# Allegro board SWM3310_V10.brd
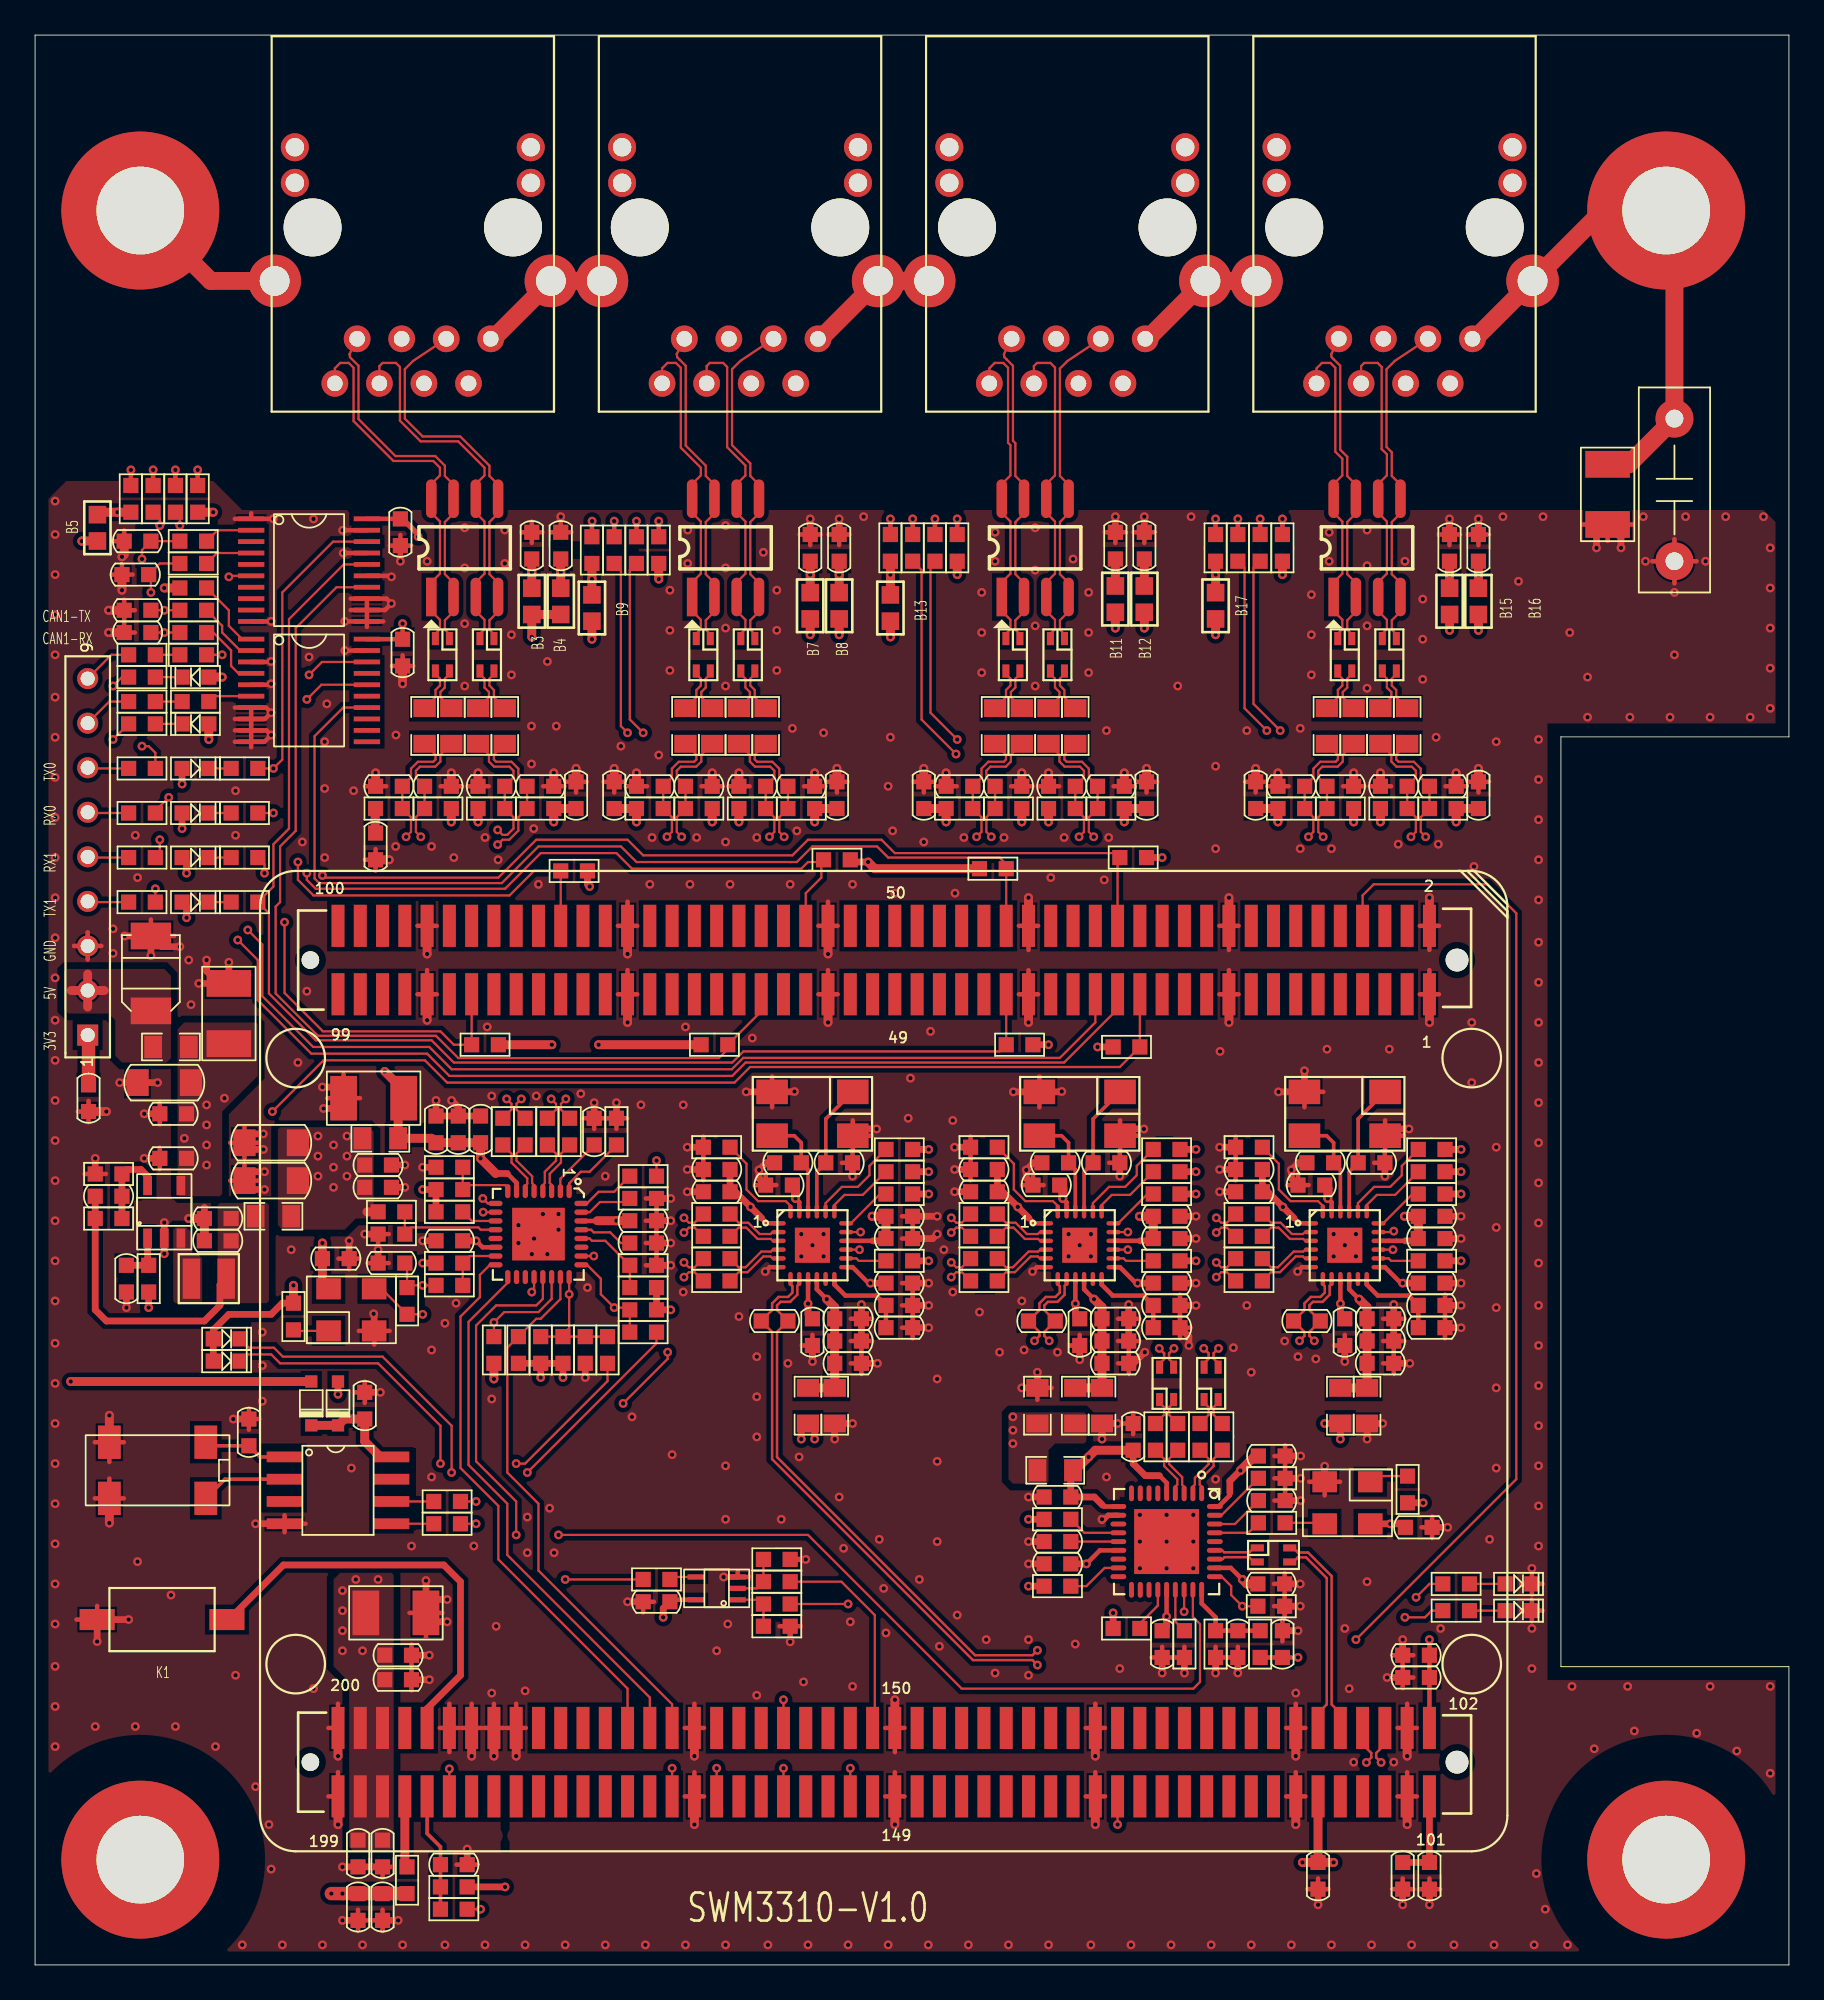
[diagram p0: board, top side]
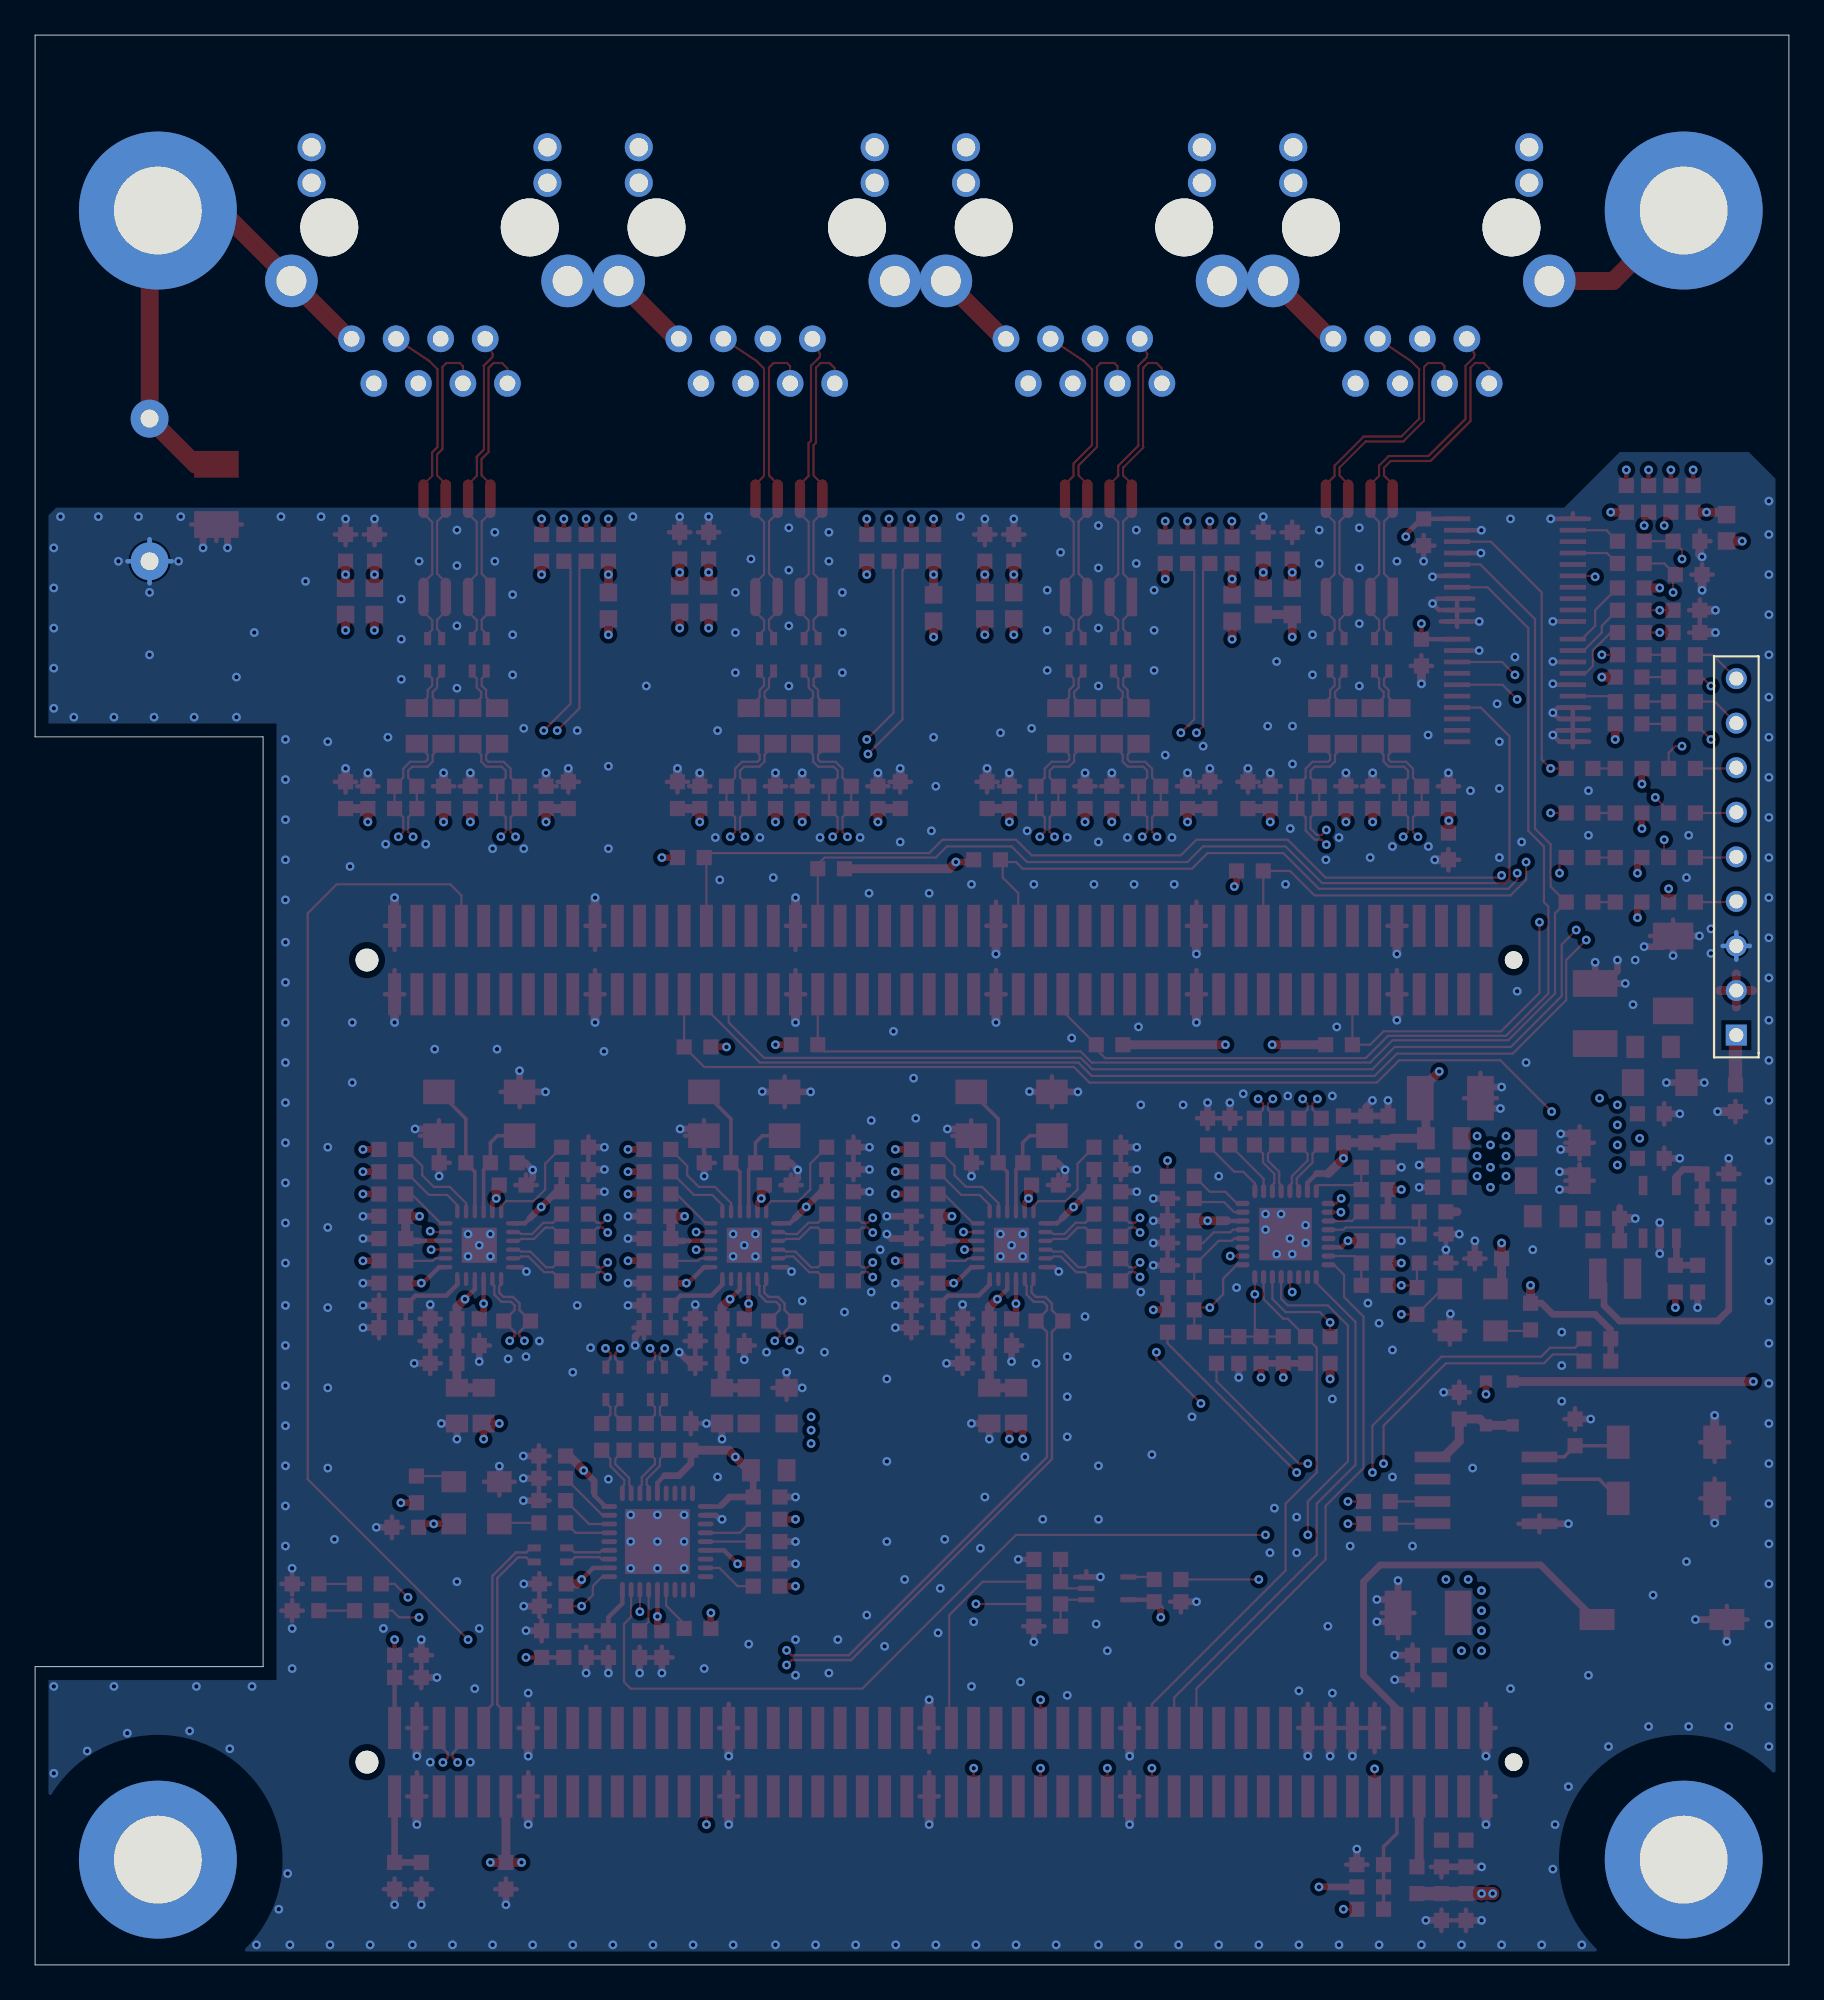
[diagram p1: board, bottom side, seen from below]

Outline 100 x 110 mm; copper layers: TOP, GND2, POWER3, BOTTOM. Coordinates in mm from the lower left corner of the outline.
Outline path: 0,110 0,0 100,0 100,17 87,17 87,70 100,70 100,110 0,110

## Design rules (mm)
net group DIFFPAIR0: nets PHY3_TD+ PHY3_TD-
net group DIFFPAIR1: nets N16908189 N16908216
net group DIFFPAIR2: nets N16908245 N16908276
net group DIFFPAIR3: nets PHY3_RD+ PHY3_RD-
net group DIFFPAIR4: nets N16904760 N16904786
net group DIFFPAIR5: nets N16904816 N16904846
net group DIFFPAIR6: nets PHY2_TD+ PHY2_TD-
net group DIFFPAIR7: nets PHY2_RD+ PHY2_RD-
net group DIFFPAIR8: nets N16906464 N16906496
net group DIFFPAIR9: nets N16906406 N16906434
net group DIFFPAIR10: nets PHY1_TD+ PHY1_TD-
net group DIFFPAIR11: nets PHY1_RD+ PHY1_RD-
net group DIFFPAIR12: nets N16795152 N16795175
net group DIFFPAIR13: nets N16795095 N16795115
net group DIFFPAIR14: nets N16784602 N16784625
net group DIFFPAIR15: nets N16784588 N16784627
net group DIFFPAIR16: nets N16784669 N16784698
net group DIFFPAIR17: nets N16784679 N16784696
net group DIFFPAIR18: nets N16928347 N16928399
net group DIFFPAIR19: nets N16928457 N16928532
net group DIFFPAIR20: nets TSEC4_RXN TSEC4_RXP
net group DIFFPAIR21: nets TSEC4_TXN TSEC4_TXP
net group DIFFPAIR22: nets N16926903 N16926978
net group DIFFPAIR23: nets N16926793 N16926845
net group DIFFPAIR24: nets TSEC3_RXN TSEC3_RXP
net group DIFFPAIR25: nets TSEC3_TXN TSEC3_TXP
net group DIFFPAIR26: nets N16828181 N16828199
net group DIFFPAIR27: nets N16828223 N16828257
net group DIFFPAIR28: nets N16830861 N16830901
net group DIFFPAIR29: nets N16830943 N16831003
net group ENET7: nets ENET1_TD+ ENET1_TD-
net group ENET8: nets ENET1_RD+ ENET1_RD-
net group ENET9: nets TSEC2_RXN TSEC2_RXP
net group ENET10: nets TSEC2_TXN TSEC2_TXP
net group ENET17: nets ENET1_TXN ENET1_TXP
net group ENET18: nets ENET1_RXN ENET1_RXP
net group USB3: nets USBDN_DM2 USBDN_DP2
net group USB25: nets USBDN_DM1 USBDN_DP1
net group USB32: nets DIFF_USB_DN2 DIFF_USB_DP2
net group USB33: nets DIFF_USB_DN1 DIFF_USB_DP1
net group USB-1: nets N16784444 N16784504

## Placement (name value [footprint] x y rotation side)
B1  -  [B0805]  58.17 28.19 180 top
B2  -  [B0805]  19.68 47.12 0 top
B3  val  [FBMA-11-160808]  28.32 77.72 90 top
B4  val  [FBMA-11-160808]  29.97 77.72 90 top
B5  val  [FBMA-11-160808]  3.56 81.92 90 top
B6  -  [B0805]  44.07 31.88 90 top
B7  val  [FBMA-11-160808]  44.2 77.47 90 top
B8  val  [FBMA-11-160808]  45.85 77.47 90 top
B9  val  [FBMA-11-160808]  31.75 77.34 90 top
B10  -  [B0805]  59.31 31.88 90 top
B11  val  [FBMA-11-160808]  61.59 77.85 90 top
B12  val  [FBMA-11-160808]  63.25 77.85 90 top
B13  val  [FBMA-11-160808]  48.77 77.34 90 top
B14  -  [B0805]  74.42 31.88 90 top
B15  val  [FBMA-11-160808]  80.65 77.72 90 top
B16  val  [FBMA-11-160808]  82.3 77.72 90 top
B17  val  [FBMA-11-160808]  67.31 77.47 90 top
B18  -  [B0805]  7.75 52.32 0 top
B19  -  [B0805]  13.59 42.67 0 top
C1  -  [C0603]  73.15 5.08 270 top
C2  -  [C0603]  18.41 3.3 270 top
C3  -  [C0603]  19.81 3.3 270 top
C4  -  [C0603]  79.5 5.08 270 top
C5  -  [C0603]  77.98 5.08 270 top
C6  -  [C0603]  78.74 17.65 180 top
C7  -  [C0603]  78.74 16.38 180 top
C8  -  [C0603]  23.88 5.71 0 top
C9  -  [C1210]  20.57 20.07 0 top
C10  -  [C0603]  18.41 6.35 270 top
C11  -  [C0603]  19.81 6.35 270 top
C12  -  [C0603]  20.7 17.65 0 top
C13  -  [C0603]  20.7 16.26 0 top
C14  -  [C0603]  68.58 18.29 270 top
C15  -  [C0603]  71.12 18.29 90 top
C16  -  [C0603]  78.89 24.94 0 top
C17  -  [C0603]  58.29 22.86 180 top
C18  -  [C0603]  64.26 18.29 270 top
C19  -  [C0603]  70.48 21.72 0 top
C20  -  [C0603]  70.51 29.01 0 top
C21  -  [C0603]  58.29 26.67 180 top
C22  -  [C0603]  62.61 30.1 90 top
C23  val  [C0805]  57.15 31.88 90 top
C24  -  [C0603]  70.51 26.47 0 top
C25  -  [C0603]  58.29 24.13 180 top
C26  -  [C0603]  25.4 47.62 90 top
C27  -  [C0603]  34.67 42.42 0 top
C28  -  [C1210]  19.3 49.4 180 top
C29  -  [C0603]  23.62 41.27 180 top
C30  -  [C0603]  17.14 40.26 0 top
C31  -  [C0603]  19.56 44.32 0 top
C32  -  [C0603]  24.13 47.62 90 top
C33  -  [C0603]  22.86 47.62 90 top
C34  -  [C0603]  31.88 47.5 90 top
C35  -  [C0603]  34.67 41.15 0 top
C36  -  [C0603]  19.56 45.59 0 top
C37  -  [C0603]  20.32 40.01 180 top
C38  -  [C0603]  20.18 67.18 0 top
C39  -  [C0603]  22.97 67.18 180 top
C40  -  [C0603]  26.02 67.18 0 top
C41  -  [C0603]  28.81 67.18 180 top
C42  -  [C0603]  19.41 63.75 270 top
C43  -  [C0603]  30.84 66.67 90 top
C44  -  [C0603]  29.97 80.9 90 top
C45  -  [C0603]  28.32 80.9 90 top
C46  -  [C0603]  42.93 45.72 180 top
C47  -  [C0603]  45.85 45.72 0 top
C48  -  [C0603]  42.42 44.45 180 top
C49  -  [C0603]  38.86 44.07 180 top
C50  -  [C0603]  49.28 38.86 0 top
C51  -  [C0603]  49.28 42.67 0 top
C52  -  [C0603]  42.16 36.7 0 top
C53  -  [C0603]  49.28 36.32 0 top
C54  -  [C0603]  49.28 37.59 0 top
C55  -  [C0603]  44.32 36.07 270 top
C56  -  [C0603]  49.28 41.4 0 top
C57  -  [C0603]  46.35 34.29 0 top
C58  -  [C0603]  46.35 35.56 0 top
C59  -  [C0603]  38.86 45.34 180 top
C60  -  [C0603]  46.35 36.83 0 top
C61  val  [C0805]  45.59 31.88 270 top
C62  -  [C0603]  37.85 67.18 180 top
C63  -  [C0603]  35.05 67.18 0 top
C64  -  [C0603]  40.89 67.18 0 top
C65  -  [C0603]  43.69 67.18 180 top
C66  -  [C0603]  33.02 66.67 90 top
C67  -  [C0603]  45.72 66.67 90 top
C68  -  [C0603]  45.85 80.77 90 top
C69  -  [C0603]  44.2 80.77 90 top
C70  -  [C0603]  58.17 45.72 180 top
C71  -  [C0603]  61.09 45.72 0 top
C72  -  [C0603]  57.66 44.45 180 top
C73  -  [C0603]  54.1 44.07 180 top
C74  -  [C0603]  64.52 38.86 0 top
C75  -  [C0603]  64.52 42.67 0 top
C76  -  [C0603]  57.4 36.7 0 top
C77  -  [C0603]  64.52 37.59 0 top
C78  -  [C0603]  64.52 36.32 0 top
C79  -  [C0603]  59.56 36.07 270 top
C80  -  [C0603]  64.52 41.4 0 top
C81  -  [C0603]  54.1 45.34 180 top
C82  -  [C0603]  61.59 36.83 0 top
C83  -  [C0603]  61.59 34.29 0 top
C84  -  [C0603]  61.59 35.56 0 top
C85  val  [C0805]  60.83 31.88 270 top
C86  -  [C0603]  55.5 67.18 180 top
C87  -  [C0603]  52.7 67.18 0 top
C88  -  [C0603]  58.55 67.18 0 top
C89  -  [C0603]  61.34 67.18 180 top
C90  -  [C0603]  50.67 66.67 90 top
C91  -  [C0603]  63.37 66.67 90 top
C92  -  [C0603]  63.25 80.9 90 top
C93  -  [C0603]  61.59 80.9 90 top
C94  -  [C0603]  73.28 45.72 180 top
C95  -  [C0603]  76.2 45.72 0 top
C96  -  [C0603]  79.63 42.67 0 top
C97  -  [C0603]  76.71 35.56 0 top
C98  -  [C0603]  79.63 38.86 0 top
C99  -  [C0603]  74.68 36.07 270 top
C100  -  [C0603]  72.52 36.7 0 top
C101  -  [C0603]  79.63 37.59 0 top
C102  -  [C0603]  79.63 36.32 0 top
C103  -  [C0603]  79.63 41.4 0 top
C104  -  [C0603]  72.77 44.45 180 top
C105  -  [C0603]  69.22 45.34 180 top
C106  -  [C0603]  76.71 34.29 0 top
C107  -  [C0603]  69.22 44.07 180 top
C108  -  [C0603]  76.71 36.83 0 top
C109  val  [C0805]  75.95 31.88 270 top
C110  -  [C0603]  74.42 67.18 180 top
C111  -  [C0603]  71.63 67.18 0 top
C112  -  [C0603]  77.47 67.18 0 top
C113  -  [C0603]  80.26 67.18 180 top
C114  -  [C0603]  69.6 66.67 90 top
C115  -  [C0603]  82.3 66.67 90 top
C116  -  [C0603]  82.3 80.77 90 top
C117  -  [C0603]  80.64 80.77 90 top
C118  -  [C0603]  35.43 20.7 180 top
C119  -  [C0603]  12.19 30.35 270 top
C120  -  [C0603]  18.8 31.88 90 top
C121  -  [C0603]  20.95 74.8 270 top
C122  -  [C0603]  5.84 81.15 180 top
C123  -  [C0603]  5.84 77.22 180 top
C124  -  [C0603]  5.71 79.25 180 top
C125  -  [C0603]  5.84 75.95 180 top
C128  -  [C0603]  3.05 49.4 270 top
C129  -  [C1206]  7.37 50.29 180 top
C130  -  [C1210]  11.05 54.23 90 top
C131  -  [C0603]  7.87 48.51 180 top
C132  -  [C1206]  13.46 46.86 180 top
C133  -  [C1206]  13.46 44.7 180 top
C134  -  [C0603]  5.21 39.12 270 top
C135  -  [C0603]  7.87 45.97 180 top
C136  -  [C0603]  10.41 41.27 180 top
C137  -  [C0603]  10.41 42.55 180 top
C138  -  [C0603]  4.19 43.81 180 top
C139  -  [C0603]  20.83 81.66 270 top
CON1  -  [IDC200_127_SMD_LK_1530EB]  48.39 34.42 0 top
CY1  -  [CY]  93.47 84.07 90 top
D1  -  [SOD-323]  15.75 32 180 top
D2  -  [SOD-323]  17.27 32 180 top
J1  -  [SIP9-254]  3 63.16 90 top
K1  -  [TVBM17]  7.24 19.68 0 top
L1  -  [ACM2012-2P]  70.61 23.37 0 top
L2  -  [ACM2012-2P]  67.06 33.15 90 top
L3  -  [ACM2012-2P]  64.52 33.15 90 top
L4  -  [CM2-2012MCIN]  23.22 74.68 270 top
L5  -  [CM2-2012MCIN]  25.76 74.68 270 top
L6  -  [CM2-2012MCIN]  38.1 74.68 270 top
L7  -  [CM2-2012MCIN]  40.64 74.68 270 top
L8  -  [CM2-2012MCIN]  55.75 74.68 270 top
L9  -  [CM2-2012MCIN]  58.29 74.68 270 top
L10  -  [CM2-2012MCIN]  74.68 74.68 270 top
L11  -  [CM2-2012MCIN]  77.22 74.68 270 top
L12  -  [HEI252012A]  9.91 39.12 0 top
LED1  -  [LED0603]  84.58 21.72 180 top
LED2  -  [LED0603]  84.58 20.19 180 top
LED3  -  [LED0603]  10.92 35.69 180 top
LED4  -  [LED0603]  10.92 34.42 180 top
LED5  -  [LED0603]  9.14 68.2 180 top
LED6  -  [LED0603]  9.14 65.66 180 top
LED7  -  [LED0603]  9.14 60.58 180 top
LED8  -  [LED0603]  9.14 63.12 180 top
LED9  -  [LED0603]  9.14 73.41 0 top
LED10  -  [LED0603]  9.14 70.74 0 top
MH1  -  [MHOLE_250X160]  93 100 0 top
MH2  -  [MHOLE_250X160]  93 6 0 top
MH3  -  [MHOLE_250X160]  6 100 0 top
MH4  -  [MHOLE_250X160]  6 6 0 top
NOREF  -  []  6 100 0 top
NOREF#2  -  []  0 0 0 top
NOREF#3  -  []  100 0 90 top
NOREF#4  -  []  0 0 90 top
NOREF#5  -  []  40.19 99.04 0 top
NOREF#6  -  []  21.54 99.04 0 top
NOREF#7  -  []  77.51 99.04 0 top
NOREF#8  -  []  6 6 90 top
NOREF#9  -  []  0 50.93 0 top
NOREF#10  -  []  0 0 90 top
NOREF#11  -  []  87 17 90 top
NOREF#12  -  []  0 0 90 top
NOREF#13  -  []  100 70 90 top
NOREF#14  -  []  0 0 0 top
NOREF#15  -  []  58.85 99.04 0 top
NOREF#16  -  []  87 17 0 top
NOREF#17  -  []  6 100 0 top
R1  -  [R0603]  25.65 52.45 180 top
R2  -  [R0603]  30.73 62.36 180 top
R3  -  [R0603]  56.13 52.45 180 top
R4  -  [R0603]  45.72 62.99 180 top
R5  -  [R0603]  62.61 63.12 180 top
R6  -  [R0603]  62.23 52.32 0 top
R7  -  [R0603]  38.73 52.45 0 top
R8  -  [R0603]  54.61 62.48 0 top
R9  -  [R0603]  21.21 4.83 270 top
R10  -  [R0603]  23.88 4.45 180 top
R11  -  [R0603]  23.88 3.17 180 top
R12  -  [R0603]  69.85 18.29 90 top
R13  -  [R0603]  58.29 25.4 0 top
R14  -  [R0603]  67.31 18.29 270 top
R15  -  [R0603]  66.42 30.1 90 top
R16  -  [R0603]  67.69 30.1 90 top
R17  -  [R0603]  58.29 21.59 0 top
R18  -  [R0603]  63.88 30.1 90 top
R19  -  [R0603]  65.15 30.1 90 top
R20  -  [R0603]  81.03 21.72 180 top
R21  -  [R0603]  70.48 20.45 0 top
R22  -  [R0603]  62.23 19.18 180 top
R23  -  [R0603]  81.03 20.19 0 top
R24  -  [R0603]  70.51 27.74 0 top
R25  -  [R0603]  65.53 18.29 270 top
R26  -  [R0603]  78.26 27.1 270 top
R27  -  [R0603]  70.51 25.2 180 top
R28  -  [R0603]  23.62 40.01 180 top
R29  -  [R0603]  33.15 47.5 90 top
R30  -  [R0603]  26.16 35.05 90 top
R31  -  [R0603]  27.56 35.05 90 top
R32  -  [R0603]  30.48 47.5 270 top
R33  -  [R0603]  29.21 47.5 270 top
R34  -  [R0603]  27.94 47.5 270 top
R35  -  [R0603]  26.67 47.5 270 top
R36  -  [R0603]  14.73 36.96 90 top
R37  -  [R0603]  34.67 44.96 180 top
R38  -  [R0603]  34.67 43.69 0 top
R39  -  [R0603]  21.21 37.85 90 top
R40  -  [R0603]  23.62 42.93 0 top
R41  -  [R0603]  23.62 38.73 180 top
R42  -  [R0603]  28.83 35.05 90 top
R43  -  [R0603]  31.37 35.05 270 top
R44  -  [R0603]  23.62 45.47 0 top
R45  -  [R0603]  23.62 44.2 180 top
R46  -  [R0603]  34.67 39.88 180 top
R47  -  [R0603]  34.67 38.61 0 top
R48  -  [R0603]  34.67 37.34 180 top
R49  -  [R0603]  20.32 41.66 0 top
R50  -  [R0603]  20.32 42.93 180 top
R51  -  [R0603]  34.67 36.07 180 top
R52  -  [R0603]  30.1 35.05 90 top
R53  -  [R0603]  32.64 35.05 90 top
R54  val  [R0805]  22.21 70.62 90 top
R55  val  [R0805]  23.73 70.62 90 top
R56  val  [R0805]  25.26 70.62 90 top
R57  val  [R0805]  26.78 70.62 90 top
R58  -  [R0603]  20.18 65.91 180 top
R59  -  [R0603]  22.97 65.91 0 top
R60  -  [R0603]  26.02 65.91 180 top
R61  -  [R0603]  28.81 65.91 0 top
R62  -  [R0603]  9.27 83.57 90 top
R63  -  [R0603]  5.46 83.57 90 top
R64  -  [R0603]  6.73 83.57 90 top
R65  -  [R0603]  8 83.57 90 top
R66  -  [R0603]  38.86 46.61 180 top
R67  -  [R0603]  49.28 46.48 180 top
R68  -  [R0603]  49.28 45.21 180 top
R69  -  [R0603]  49.28 43.94 180 top
R70  -  [R0603]  38.86 42.8 180 top
R71  -  [R0603]  38.86 41.53 180 top
R72  -  [R0603]  38.86 40.26 180 top
R73  -  [R0603]  38.86 38.99 180 top
R74  -  [R0603]  49.28 40.13 0 top
R75  val  [R0805]  37.08 70.62 90 top
R76  val  [R0805]  38.61 70.62 90 top
R77  val  [R0805]  40.13 70.62 90 top
R78  val  [R0805]  41.66 70.62 90 top
R79  -  [R0603]  35.05 65.91 180 top
R80  -  [R0603]  37.85 65.91 0 top
R81  -  [R0603]  40.89 65.91 180 top
R82  -  [R0603]  43.69 65.91 0 top
R83  -  [R0603]  35.56 80.64 90 top
R84  -  [R0603]  31.75 80.64 90 top
R85  -  [R0603]  33.02 80.64 90 top
R86  -  [R0603]  34.29 80.64 90 top
R87  -  [R0603]  54.1 46.61 180 top
R88  -  [R0603]  64.52 45.21 180 top
R89  -  [R0603]  54.1 42.8 180 top
R90  -  [R0603]  64.52 46.48 180 top
R91  -  [R0603]  64.52 43.94 180 top
R92  -  [R0603]  54.1 41.53 180 top
R93  -  [R0603]  54.1 40.26 180 top
R94  -  [R0603]  54.1 38.99 180 top
R95  -  [R0603]  64.52 40.13 0 top
R96  val  [R0805]  54.74 70.62 90 top
R97  val  [R0805]  56.26 70.62 90 top
R98  val  [R0805]  57.78 70.62 90 top
R99  val  [R0805]  59.31 70.62 90 top
R100  -  [R0603]  52.7 65.91 180 top
R101  -  [R0603]  55.5 65.91 0 top
R102  -  [R0603]  58.55 65.91 180 top
R103  -  [R0603]  61.34 65.91 0 top
R104  -  [R0603]  52.58 80.77 90 top
R105  -  [R0603]  48.77 80.77 90 top
R106  -  [R0603]  50.04 80.77 90 top
R107  -  [R0603]  51.31 80.77 90 top
R108  -  [R0603]  69.22 46.61 180 top
R109  -  [R0603]  69.22 42.8 180 top
R110  -  [R0603]  79.63 46.48 180 top
R111  -  [R0603]  79.63 45.21 180 top
R112  -  [R0603]  79.63 43.94 180 top
R113  -  [R0603]  69.22 41.53 180 top
R114  -  [R0603]  69.22 40.26 180 top
R115  -  [R0603]  69.22 38.99 180 top
R116  -  [R0603]  79.63 40.13 0 top
R117  val  [R0805]  73.66 70.62 90 top
R118  val  [R0805]  75.18 70.62 90 top
R119  val  [R0805]  76.71 70.62 90 top
R120  val  [R0805]  78.23 70.62 90 top
R121  -  [R0603]  71.63 65.91 180 top
R122  -  [R0603]  74.42 65.91 0 top
R123  -  [R0603]  77.47 65.91 180 top
R124  -  [R0603]  80.26 65.91 0 top
R125  -  [R0603]  71.12 80.77 90 top
R126  -  [R0603]  67.31 80.77 90 top
R127  -  [R0603]  68.58 80.77 90 top
R128  -  [R0603]  69.85 80.77 90 top
R129  -  [R0603]  42.29 20.57 180 top
R130  -  [R0603]  42.29 21.84 180 top
R131  -  [R0603]  35.43 21.97 180 top
R132  -  [R0603]  42.29 19.3 0 top
R133  -  [R0603]  42.29 23.11 0 top
R134  -  [R0603]  23.5 26.42 0 top
R135  -  [R0603]  23.5 25.15 0 top
R136  -  [R0603]  9.02 81.15 180 top
R137  -  [R0603]  9.02 77.22 180 top
R138  -  [R0603]  9.02 79.88 180 top
R139  -  [R0603]  9.02 75.95 180 top
R140  -  [R0603]  9.02 74.68 180 top
R141  -  [R0603]  9.14 72.01 180 top
R142  -  [R0603]  6.1 70.74 180 top
R143  -  [R0603]  6.1 73.41 180 top
R144  -  [R0603]  11.94 63.12 0 top
R145  -  [R0603]  11.94 60.58 0 top
R146  -  [R0603]  11.94 65.66 0 top
R147  -  [R0603]  11.94 68.2 0 top
R148  -  [R0603]  6.1 72.01 0 top
R149  -  [R0603]  6.1 74.68 0 top
R152  -  [R0603]  6.1 68.2 0 top
R153  -  [R0603]  6.1 65.66 0 top
R154  -  [R0603]  6.1 60.58 0 top
R155  -  [R0603]  6.1 63.12 0 top
R156  -  [R0603]  6.48 39.12 90 top
R157  -  [R0603]  4.19 42.55 180 top
R158  -  [R0603]  4.19 45.09 180 top
R159  -  [R1210]  89.66 83.82 90 top
R160  -  [R0603]  9.02 78.49 0 top
T1  -  [HR871181AE]  21.54 99.04 0 top
T2  -  [HR871181AE]  40.19 99.04 0 top
T3  -  [HR871181AE]  58.85 99.04 0 top
T4  -  [HR871181AE]  77.51 99.04 0 top
TVS1  -  [SO8-127]  24.49 80.77 90 top
TVS2  -  [SO8-127]  39.37 80.77 90 top
TVS3  -  [SO8-127]  57.02 80.77 90 top
TVS4  -  [SO8-127]  75.95 80.77 90 top
TVS5  -  [SOD-15]  6.6 56.52 90 top
U1  -  [SQFN-36]  64.52 24.13 270 top
U2  -  [RTL8201F_QFN32]  28.7 41.66 270 top
U3  -  [SR9900AI_QFN24_4X4_0P5]  44.32 41.02 0 top
U4  -  [SR9900AI_QFN24_4X4_0P5]  59.56 41.02 0 top
U5  -  [SR9900AI_QFN24_4X4_0P5]  74.68 41.02 0 top
U6  -  [SC-70]  38.86 21.46 180 top
U7  -  [SO-8]  17.27 27.05 0 top
U8  -  [TSSOP20]  15.62 79.5 0 top
U9  -  [SOT23-5L]  7.37 42.93 90 top
U10  -  [TSSOP20]  15.62 72.64 0 top
Y1  -  [DSO531SR]  74.83 26.34 180 top
Y2  -  [DSO531SR]  18.03 37.34 0 top
Y3  -  [HCX-6SB]  44.32 48.51 180 top
Y4  -  [HCX-6SB]  59.56 48.51 180 top
Y5  -  [HCX-6SB]  74.68 48.51 180 top
Y6  -  [MC-306]  6.99 28.19 180 top

## Library data of the parts
B1-B19 = INDUCTOR
C1-C125 C128-C139 CY1 = CAP
CON1 = IDC200
D1 D2 = DIODE
J1 = CON9
K1 = TVBM17-025BL-R
L1-L3 = ACM2012-900-2P
L4-L11 = CM2-2012MCIN
L12 = INDUCTORS OF FERRITE
LED1-LED10 = LED
MH1-MH4 = MHOLE
R1-R149 R152-R160 = R
T1-T4 = HR871181AE
TVS1-TVS4 = TVS4A_1
TVS5 = TVS-DIODE
U1 = USB2512B/M2
U2 = RTL8201F_0
U3-U5 = SR9900_3
U6 = SN74LVC1G126DCKT_0
U7 = PCF8563TS_0
U8 U10 = SN74ALVC245D_1
U9 = WD20027MER_0
Y1 = DSO531SR_0
Y2 = VCO_0
Y3-Y5 = XTAL1A
Y6 = 32.768KHz

## Footprints (pads in the part's own frame, mm; a bottom-side part is the same pattern mirrored in y, then rotated)
ACM2012-2P
  rect 0.75x0.4 smd: 1(-0.925,0.4) 2(-0.925,-0.4) 3(0.925,-0.4) 4(0.925,0.4)
B0805
  rect 1.016x1.27 smd: 1(-1.016,0) 2(1.016,0)
C0603
  rect 0.864x0.864 smd: 1(-0.762,0) 2(0.762,0)
C0805
  rect 1.016x1.27 smd: 1(-1.016,0) 2(1.016,0)
C1206
  rect 1.27x1.524 smd: 1(-1.524,0) 2(1.524,0)
C1210
  rect 1.524x2.54 smd: 1(-1.714,0) 2(1.714,0)
CM2-2012MCIN
  rect 0.75x0.4 smd: 1(-0.925,0.4) 2(0.925,0.4) 3(-0.925,-0.4) 4(0.925,-0.4)
CY
  round 2.159 hole 1.016: 1(-4.064,0) 2(4.064,0)
DSO531SR
  rect 1.4x1.2 smd: 1(-1.3,-1.2) 2(1.3,-1.2) 3(1.3,1.2) 4(-1.3,1.2)
FBMA-11-160808
  rect 1x1 smd: 1(-0.75,0) 2(0.75,0)
HCX-6SB
  rect 1.8x1.4 smd: 1(-2.3,-1.25) 2(2.3,-1.25) 3(2.3,1.25) 4(-2.3,1.25)
HEI252012A
  rect 1x2.3 smd: 1(-0.991,0) 2(0.991,0)
HR871181AE
  round 3.3 hole 3.3 unplated: (-5.715,0) (5.715,0)
  round 1.524 hole 0.889: P1(-4.445,-8.89) P2(-3.175,-6.35) P3(-1.905,-8.89) P4(-0.635,-6.35) P5(0.635,-8.89) P6(1.905,-6.35) P7(3.175,-8.89) P8(4.445,-6.35)
  round 1.6 hole 1.05: P9(-6.725,2.54) P10(-6.725,4.57) P11(6.725,2.54) P12(6.725,4.57)
  round 3 hole 1.7: PG1(-7.875,-3.05) PG2(7.875,-3.05)
IDC200_127_SMD_LK_1530EB
  round 1.001 hole 1.001 unplated: (-32.69,22.86) (-32.69,-22.86)
  round 1.301 hole 1.301 unplated: (32.69,22.86) (32.69,-22.86)
  rect 0.739x2.4 smd: 1(31.115,20.909) 2(31.115,24.811) 3(29.845,20.909) 4(29.845,24.811) 5(28.575,20.909) 6(28.575,24.811) 7(27.305,20.909) 8(27.305,24.811) 9(26.035,20.909) 10(26.035,24.811) 11(24.765,20.909) 12(24.765,24.811) 13(23.495,20.909) 14(23.495,24.811) 15(22.225,20.909) 16(22.225,24.811) 17(20.955,20.909) 18(20.955,24.811) 19(19.685,20.909) 20(19.685,24.811) 21(18.415,20.909) 22(18.415,24.811) 23(17.145,20.909) 24(17.145,24.811) 25(15.875,20.909) 26(15.875,24.811) 27(14.605,20.909) 28(14.605,24.811) 29(13.335,20.909) 30(13.335,24.811) 31(12.065,20.909) 32(12.065,24.811) 33(10.795,20.909) 34(10.795,24.811) 35(9.525,20.909) 36(9.525,24.811) 37(8.255,20.909) 38(8.255,24.811) 39(6.985,20.909) 40(6.985,24.811) 41(5.715,20.909) 42(5.715,24.811) 43(4.445,20.909) 44(4.445,24.811) 45(3.175,20.909) 46(3.175,24.811) 47(1.905,20.909) 48(1.905,24.811) 49(0.635,20.909) 50(0.635,24.811) 51(-0.635,20.909) 52(-0.635,24.811) 53(-1.905,20.909) 54(-1.905,24.811) 55(-3.175,20.909) 56(-3.175,24.811) 57(-4.445,20.909) 58(-4.445,24.811) 59(-5.715,20.909) 60(-5.715,24.811) 61(-6.985,20.909) 62(-6.985,24.811) 63(-8.255,20.909) 64(-8.255,24.811) 65(-9.525,20.909) 66(-9.525,24.811) 67(-10.795,20.909) 68(-10.795,24.811) 69(-12.065,20.909) 70(-12.065,24.811) 71(-13.335,20.909) 72(-13.335,24.811) 73(-14.605,20.909) 74(-14.605,24.811) 75(-15.875,20.909) 76(-15.875,24.811) 77(-17.145,20.909) 78(-17.145,24.811) 79(-18.415,20.909) 80(-18.415,24.811) 81(-19.685,20.909) 82(-19.685,24.811) 83(-20.955,20.909) 84(-20.955,24.811) 85(-22.225,20.909) 86(-22.225,24.811) 87(-23.495,20.909) 88(-23.495,24.811) 89(-24.765,20.909) 90(-24.765,24.811) 91(-26.035,20.909) 92(-26.035,24.811) 93(-27.305,20.909) 94(-27.305,24.811) 95(-28.575,20.909) 96(-28.575,24.811) 97(-29.845,20.909) 98(-29.845,24.811) 99(-31.115,20.909) 100(-31.115,24.811) 101(31.115,-24.811) 102(31.115,-20.909) 103(29.845,-24.811) 104(29.845,-20.909) 105(28.575,-24.811) 106(28.575,-20.909) 107(27.305,-24.811) 108(27.305,-20.909) 109(26.035,-24.811) 110(26.035,-20.909) 111(24.765,-24.811) 112(24.765,-20.909) 113(23.495,-24.811) 114(23.495,-20.909) 115(22.225,-24.811) 116(22.225,-20.909) 117(20.955,-24.811) 118(20.955,-20.909) 119(19.685,-24.811) 120(19.685,-20.909) 121(18.415,-24.811) 122(18.415,-20.909) 123(17.145,-24.811) 124(17.145,-20.909) 125(15.875,-24.811) 126(15.875,-20.909) 127(14.605,-24.811) 128(14.605,-20.909) 129(13.335,-24.811) 130(13.335,-20.909) 131(12.065,-24.811) 132(12.065,-20.909) 133(10.795,-24.811) 134(10.795,-20.909) 135(9.525,-24.811) 136(9.525,-20.909) 137(8.255,-24.811) 138(8.255,-20.909) 139(6.985,-24.811) 140(6.985,-20.909) 141(5.715,-24.811) 142(5.715,-20.909) 143(4.445,-24.811) 144(4.445,-20.909) 145(3.175,-24.811) 146(3.175,-20.909) 147(1.905,-24.811) 148(1.905,-20.909) 149(0.635,-24.811) 150(0.635,-20.909) 151(-0.635,-24.811) 152(-0.635,-20.909) 153(-1.905,-24.811) 154(-1.905,-20.909) 155(-3.175,-24.811) 156(-3.175,-20.909) 157(-4.445,-24.811) 158(-4.445,-20.909) 159(-5.715,-24.811) 160(-5.715,-20.909) 161(-6.985,-24.811) 162(-6.985,-20.909) 163(-8.255,-24.811) 164(-8.255,-20.909) 165(-9.525,-24.811) 166(-9.525,-20.909) 167(-10.795,-24.811) 168(-10.795,-20.909) 169(-12.065,-24.811) 170(-12.065,-20.909) 171(-13.335,-24.811) 172(-13.335,-20.909) 173(-14.605,-24.811) 174(-14.605,-20.909) 175(-15.875,-24.811) 176(-15.875,-20.909) 177(-17.145,-24.811) 178(-17.145,-20.909) 179(-18.415,-24.811) 180(-18.415,-20.909) 181(-19.685,-24.811) 182(-19.685,-20.909) 183(-20.955,-24.811) 184(-20.955,-20.909) 185(-22.225,-24.811) 186(-22.225,-20.909) 187(-23.495,-24.811) 188(-23.495,-20.909) 189(-24.765,-24.811) 190(-24.765,-20.909) 191(-26.035,-24.811) 192(-26.035,-20.909) 193(-27.305,-24.811) 194(-27.305,-20.909) 195(-28.575,-24.811) 196(-28.575,-20.909) 197(-29.845,-24.811) 198(-29.845,-20.909) 199(-31.115,-24.811) 200(-31.115,-20.909)
LED0603
  rect 0.864x0.864 smd: 1(-0.762,0) 2(0.762,0)
MC-306
  rect 1.3x1.9 smd: 1(-2.75,-1.6) 2(2.75,-1.6) 3(2.75,1.6) 4(-2.75,1.6)
MHOLE_250X160
  round 9 hole 5: 1(0,0)
R0603
  rect 0.864x0.864 smd: 1(-0.762,0) 2(0.762,0)
R0805
  rect 1.016x1.27 smd: 1(-1.016,0) 2(1.016,0)
R1210
  rect 1.524x2.54 smd: 1(-1.714,0) 2(1.714,0)
RTL8201F_QFN32
  oval 0.8x0.3 smd: 1(-2.45,1.75) 2(-2.45,1.25) 3(-2.45,0.75) 4(-2.45,0.25) 5(-2.45,-0.25) 6(-2.45,-0.75) 7(-2.45,-1.25) 8(-2.45,-1.75) 17(2.45,-1.75) 18(2.45,-1.25) 19(2.45,-0.75) 20(2.45,-0.25) 21(2.45,0.25) 22(2.45,0.75) 23(2.45,1.25) 24(2.45,1.75)
  oval 0.3x0.8 smd: 9(-1.75,-2.45) 10(-1.25,-2.45) 11(-0.75,-2.45) 12(-0.25,-2.45) 13(0.25,-2.45) 14(0.75,-2.45) 15(1.25,-2.45) 16(1.75,-2.45) 25(1.75,2.45) 26(1.25,2.45) 27(0.75,2.45) 28(0.25,2.45) 29(-0.25,2.45) 30(-0.75,2.45) 31(-1.25,2.45) 32(-1.75,2.45)
  rect 3x3 smd: 33(0,0)
SC-70
  rect 0.92x0.3 smd: 1(-1.2,0.65) 2(-1.2,0) 3(-1.2,-0.65) 4(1.2,-0.65) 5(1.2,0.65)
SIP9-254
  rect 1.2x1.2 hole 0.8: 1(-10.16,0)
  round 1.2 hole 0.8: 2(-7.62,0) 3(-5.08,0) 4(-2.54,0) 5(0,0) 6(2.54,0) 7(5.08,0) 8(7.62,0) 9(10.16,0)
SO8-127
  rect 2.2x0.6 smd: 1(-2.8,1.905)
  oval 2.2x0.6 smd: 2(-2.8,0.635) 3(-2.8,-0.635) 4(-2.8,-1.905) 5(2.801,-1.905) 6(2.801,-0.635) 7(2.801,0.635) 8(2.801,1.905)
SO-8
  rect 2.032x0.61 smd: 1(-3.048,1.905) 2(-3.048,0.635) 3(-3.048,-0.635) 4(-3.048,-1.905) 5(3.048,-1.905) 6(3.048,-0.635) 7(3.048,0.635) 8(3.048,1.905)
SOD-15
  rect 1.52x2.3 smd: 1(-2.135,0) 2(2.135,0)
SOD-323
  rect 0.7x0.7 smd: 1(0,1.25) 2(0,-1.25)
SOT23-5L
  rect 1.1x0.5 smd: 1(-1.5,0.95) 2(-1.5,0) 3(-1.5,-0.95) 4(1.5,-0.95) 5(1.5,0.95)
SQFN-36
  oval 0.9x0.28 smd: 1(-2.75,2) 2(-2.75,1.5) 3(-2.75,1) 4(-2.75,0.5) 5(-2.75,0) 6(-2.75,-0.5) 7(-2.75,-1) 8(-2.75,-1.5) 9(-2.75,-2) 19(2.75,-2) 20(2.75,-1.5) 21(2.75,-1) 22(2.75,-0.5) 23(2.75,0) 24(2.75,0.5) 25(2.75,1) 26(2.75,1.5) 27(2.75,2)
  oval 0.28x0.9 smd: 10(-2,-2.75) 11(-1.5,-2.75) 12(-1,-2.75) 13(-0.5,-2.75) 14(0,-2.75) 15(0.5,-2.75) 16(1,-2.75) 17(1.5,-2.75) 18(2,-2.75) 28(2,2.75) 29(1.5,2.75) 30(1,2.75) 31(0.5,2.75) 32(0,2.75) 33(-0.5,2.75) 34(-1,2.75) 35(-1.5,2.75) 36(-2,2.75)
  rect 3.7x3.7 smd: 37(0,0)
SR9900AI_QFN24_4X4_0P5
  oval 0.8x0.25 smd: 1(-1.925,1.25) 2(-1.925,0.75) 3(-1.925,0.25) 4(-1.925,-0.25) 5(-1.925,-0.75) 6(-1.925,-1.25) 13(1.925,-1.25) 14(1.925,-0.75) 15(1.925,-0.25) 16(1.925,0.25) 17(1.925,0.75) 18(1.925,1.25)
  oval 0.25x0.8 smd: 7(-1.25,-1.925) 8(-0.75,-1.925) 9(-0.25,-1.925) 10(0.25,-1.925) 11(0.75,-1.925) 12(1.25,-1.925) 19(1.25,1.925) 20(0.75,1.925) 21(0.25,1.925) 22(-0.25,1.925) 23(-0.75,1.925) 24(-1.25,1.925)
  rect 2x2 smd: 25(0,0)
TSSOP20
  rect 1.5x0.27 smd: 1(-3.3,2.925) 2(-3.3,2.275) 3(-3.3,1.625) 4(-3.3,0.975) 5(-3.3,0.325) 6(-3.3,-0.325) 7(-3.3,-0.975) 8(-3.3,-1.625) 9(-3.3,-2.275) 10(-3.3,-2.925) 11(3.3,-2.925) 12(3.3,-2.275) 13(3.3,-1.625) 14(3.3,-0.975) 15(3.3,-0.325) 16(3.3,0.325) 17(3.3,0.975) 18(3.3,1.625) 19(3.3,2.275) 20(3.3,2.925)
TVBM17
  rect 2x1.2 smd: 1(-3.7,0) 2(3.7,0)

## Nets
GND: C1.2 C2.2 C3.2 C4.2 C5.2 C6.2 C7.2 C8.2 C9.2 C10.2 C11.2 C12.2 C13.2 C14.2 C15.2 C16.2 C17.2 C18.2 C19.2 C20.2 C21.2 C22.2 C23.2 C24.2 C25.2 C26.2 C27.2 C28.2 C29.2 C30.2 C31.2 C32.2 C33.2 C34.2 C35.2 C36.2 C37.2 C38.1 C39.1 C40.1 C41.1 C42.2 C43.2 C44.2 C45.2 C46.2 C47.2 C48.2 C49.2 C50.2 C51.2 C53.2 C54.2 C55.2 C56.2 C57.2 C58.2 C59.2 C60.2 C61.2 C62.1 C63.1 C64.1 C65.1 C66.2 C67.2 C68.2 C69.2 C70.2 C71.2 C72.2 C73.2 C74.2 C75.2 C77.2 C78.2 C79.2 C80.2 C81.2 C82.2 C83.2 C84.2 C85.2 C86.1 C87.1 C88.1 C89.1 C90.2 C91.2 C92.2 C93.2 C94.2 C95.2 C96.2 C97.2 C98.2 C99.2 C101.2 C102.2 C103.2 C104.2 C105.2 C106.2 C107.2 C108.2 C109.2 C110.1 C111.1 C112.1 C113.1 C114.2 C115.2 C116.2 C117.2 C118.2 C119.1 C120.2 C121.2 C122.2 C123.2 C124.2 C125.2 C128.2 C129.2 C130.2 C131.2 C132.2 C133.2 C134.2 C135.2 C136.2 C137.2 C139.2 CON1.1 CON1.2 CON1.19 CON1.20 CON1.37 CON1.38 CON1.55 CON1.56 CON1.73 CON1.74 CON1.91 CON1.92 CON1.103 CON1.104 CON1.113 CON1.114 CON1.131 CON1.132 CON1.149 CON1.150 CON1.167 CON1.168 CON1.184 CON1.186 CON1.188 CON1.190 CON1.199 CON1.200 CY1.1 J1.3 K1.1 LED1.1 LED2.1 R14.2 R21.2 R24.2 R25.2 R29.2 R38.2 R43.2 R44.1 R46.1 R49.1 R66.2 R87.2 R108.2 R132.2 R133.2 R158.2 R159.1 TVS5.2 U1.11(TEST) U1.37(VSS) U2.33(PGND) U3.6(U2GND) U3.25(EPAD) U4.6(U2GND) U4.25(EPAD) U5.6(U2GND) U5.25(EPAD) U6.3(GND) U7.4(VSS) U8.1(DIR) U8.10(GND) U8.11(B7) U8.12(B6) U8.13(B5) U8.15(B3) U8.17(B1) U8.19(O\E\) U9.2(GND) U10.3(A1) U10.5(A3) U10.7(A5) U10.8(A6) U10.9(A7) U10.10(GND) U10.19(O\E\) Y1.2(GND) Y2.2(GND) Y3.2 Y3.4 Y4.2 Y4.4 Y5.2 Y5.4 Y6.2 Y6.3
GND_EARTH: CY1.2 MH1.1 MH2.1 MH3.1 MH4.1 R159.2 T1.P8 T1.PG1 T1.PG2 T2.P8 T2.PG1 T2.PG2 T3.P8 T3.PG1 T3.PG2 T4.P8 T4.PG1 T4.PG2
VBATT: C2.1 C3.1 C128.1 D1.2 J1.1 R9.2
VBUS_OTG: C4.1 C5.1 CON1.101
VBUS_SW: C6.1 C7.1 C15.1 CON1.102 R12.1
VDD1V2_PHY1: C48.1 C51.1 C55.1 C56.1 U3.9(DVDD12#9) U3.16(DVDD12#16) U3.23(AVDD12)
VDD1V2_PHY2: C72.1 C75.1 C79.1 C80.1 U4.9(DVDD12#9) U4.16(DVDD12#16) U4.23(AVDD12)
VDD1V2_PHY3: C96.1 C99.1 C103.1 C104.1 U5.9(DVDD12#9) U5.16(DVDD12#16) U5.23(AVDD12)
VDD3V3: B1.2 B2.1 B5.1 B6.1 B7.1 B8.1 B9.1 B10.1 B11.1 B12.1 B13.1 B14.1 B15.1 B16.1 B17.1 B19.2 C1.1 C16.1 C17.1 C18.1 C23.1 C29.1 C30.1 C31.1 C36.1 C50.1 C74.1 C98.1 C118.1 C121.1 C132.1 C133.1 C139.1 CON1.111 D2.2 LED3.2 LED4.2 LED5.2 LED6.2 LED7.2 LED8.2 LED9.2 LED10.2 R1.1 R2.1 R3.1 R4.1 R5.1 R6.1 R7.1 R8.1 R10.1 R13.1 R17.1 R22.2 R26.2 R28.2 R30.1 R31.1 R36.2 R40.1 R42.1 R45.2 R47.2 R48.1 R50.2 R52.1 R67.1 R68.1 R69.1 R74.2 R88.1 R90.1 R91.1 R95.2 R110.1 R111.1 R112.1 R116.2 R160.1 U1.15(VDD33#15) U1.23(VDD33#23) U2.14(DVDD33) U3.13(DVDD33) U4.13(DVDD33) U5.13(DVDD33) U6.5(VCC) U8.20(VCC) U10.20(VCC) Y1.4(VDD) Y2.4(VCC)
VDD5V: B18.2 C9.1 C10.1 C11.1 C12.1 C13.1 C129.1 C130.1 C131.1 C135.1 CON1.195 CON1.196 CON1.197 CON1.198 R156.1 U9.4(IN)
VDD5V_IN: B18.1 J1.2 TVS5.1
VDDA3V3: B2.2 B3.1 B4.1 C26.1 C27.1 C28.1 C32.1 C33.1 U2.7(AVDD33#7) U2.30(AVDD33#30)
VDDA3V3_PHY1: B6.2 C49.1 C57.1 C58.1 C59.1 C60.1 C61.1 U3.1(AVDD33#1) U3.10(AVDD33#10)
VDDA3V3_PHY2: B10.2 C73.1 C81.1 C82.1 C83.1 C84.1 C85.1 U4.1(AVDD33#1) U4.10(AVDD33#10)
VDDA3V3_PHY3: B14.2 C97.1 C105.1 C106.1 C107.1 C108.1 C109.1 U5.1(AVDD33#1) U5.10(AVDD33#10)
VDDA18CR: C25.1 U1.14(CRFILT)
VDDA18PLL: C24.1 U1.34(PLLFILT)
CAN1_RXD: R141.2 R148.2
CAN1_TXD: R140.2 R149.2
CPU_GPIO_PD10: CON1.8 R129.1
CPU_GPIO_PD11: CON1.152 R130.1
DIFF_USB_DN1: C52.1 CON1.108 U3.7(U2DM)
DIFF_USB_DN2: CON1.112 L1.3
DIFF_USB_DP1: C52.2 CON1.106 U3.8(U2DP)
DIFF_USB_DP2: CON1.110 L1.4
ENET1_LINK: R64.2 T1.P10
ENET1_RD+: C40.2 R34.1 R56.1 R60.1
ENET1_RD-: C41.2 R35.1 R57.1 R61.1
ENET1_REFCLK: R37.2 U2.32(CKXTAL2)
ENET1_RXN: L5.1 T1.P6 TVS1.4 TVS1.5
ENET1_RXP: L5.3 T1.P3 TVS1.3 TVS1.6
ENET1_SPEED: R65.2 T1.P12
ENET1_TD+: C38.2 R32.1 R54.1 R58.1
ENET1_TD-: C39.2 R33.1 R55.1 R59.1
ENET1_TXN: L4.1 T1.P2 TVS1.2 TVS1.7
ENET1_TXP: L4.3 T1.P1 TVS1.1 TVS1.8
ENET2_LINK: R85.2 T2.P10
ENET2_SPEED: R86.2 T2.P12
ENET3_LINK: R106.2 T3.P10
ENET3_SPEED: R107.2 T3.P12
ENET4_LINK: R127.2 T4.P10
ENET4_SPEED: R128.2 T4.P12
ENET_MDC: CON1.165 R30.2 U2.22(MDC)
ENET_MDIO: CON1.170 R31.2 U2.23(MDIO)
FDCAN1_RX: CON1.40 R8.2 U10.14(B4)
FDCAN1_TX: CON1.61 R7.2 U8.14(B4)
I2C2_SCL: CON1.30 R5.2 R134.2
I2C2_SDA: CON1.27 R6.2 R135.2
LED_CAN1_TRIGGER_RX: CON1.29 R142.2
LED_CAN1_TRIGGER_TX: CON1.31 R143.2
OCS_N1: R13.2 U1.13(OCS_N1)
OCS_N2: R17.2 U1.17(OCS_N2)
PHY1_AVDD10: C34.1 U2.2(AVDD10OUT)
PHY1_DVDD10: C35.1 U2.29(DVDD10OUT)
PHY1_LED0: R42.2 R43.1 R52.2 R53.2 R65.1 U2.24(LED0/PHYAD0/PMEB)
PHY1_LED1: R48.2 R51.2 R64.1 U2.25(LED1/PHYAD1)
PHY1_RD+: C64.2 R72.2 R77.1 R81.1
PHY1_RD-: C65.2 R73.2 R78.1 R82.1
PHY1_REF_CLK: R28.1 R41.1 U2.15(TXC)
PHY1_RXD3: R49.2 R50.1 U2.12(RXD3/CLK_CTL)
PHY1_RXDV: R44.2 R45.1 U2.8(RXDV)
PHY1_TD+: C63.2 R70.2 R75.1 R79.1
PHY1_TD-: C62.2 R71.2 R76.1 R80.1
PHY2_RD+: C88.2 R93.2 R98.1 R102.1
PHY2_RD-: C89.2 R94.2 R99.1 R103.1
PHY2_TD+: C87.2 R89.2 R96.1 R100.1
PHY2_TD-: C86.2 R92.2 R97.1 R101.1
PHY3_RD+: C112.2 R114.2 R119.1 R123.1
PHY3_RD-: C113.2 R115.2 R120.1 R124.1
PHY3_TD+: C111.2 R109.2 R117.1 R121.1
PHY3_TD-: C110.2 R113.2 R118.1 R122.1
RBIAS: R24.1 U1.35(RBIAS)
RMII_CRS_DV: CON1.153 U2.26(CRS/CRS_DV)
RMII_REFCLK: C37.1 CON1.169 R39.2 R41.2
RMII_RXD0: CON1.159 U2.9(RXD0)
RMII_RXD1: CON1.160 U2.10(RXD1)
RMII_RXER: R46.2 R47.1 U2.28(RXER/FXEN)
RMII_TXD0: CON1.174 U2.16(TXD0)
RMII_TXD1: CON1.172 U2.17(TXD1)
RMII_TXEN: CON1.129 U2.20(TXEN)
RST_OUT_N: R11.1 U1.26(RESET_N) U2.21(P\H\Y\R\S\T\B\)
SYS_RESETN: C8.1 CON1.191 R10.2 R11.2
SYS_RST_IN: CON1.192 K1.2
TSEC2_RXN: L7.1 T2.P6 TVS2.4 TVS2.5
TSEC2_RXP: L7.3 T2.P3 TVS2.3 TVS2.6
TSEC2_TXN: L6.1 T2.P2 TVS2.2 TVS2.7
TSEC2_TXP: L6.3 T2.P1 TVS2.1 TVS2.8
TSEC3_RXN: L9.1 T3.P6 TVS3.4 TVS3.5
TSEC3_RXP: L9.3 T3.P3 TVS3.3 TVS3.6
TSEC3_TXN: L8.1 T3.P2 TVS3.2 TVS3.7
TSEC3_TXP: L8.3 T3.P1 TVS3.1 TVS3.8
TSEC4_RXN: L11.1 T4.P6 TVS4.4 TVS4.5
TSEC4_RXP: L11.3 T4.P3 TVS4.3 TVS4.6
TSEC4_TXN: L10.1 T4.P2 TVS4.2 TVS4.7
TSEC4_TXP: L10.3 T4.P1 TVS4.1 TVS4.8
UART_RXD0: C123.1 R137.2 R153.2
UART_RXD1: C125.1 R139.2 R155.2
UART_TXD0: C122.1 R136.2 R152.2
UART_TXD1: C124.1 R138.2 R154.2
USART1_RX: CON1.80 R2.2 R146.2 U10.18(B0)
USART1_TX: CON1.87 R1.2 R147.2 U8.18(B0)
USART2_RX: CON1.58 R4.2 R144.2 U10.16(B2)
USART2_TX: CON1.39 R3.2 R145.2 U8.16(B2)
USB_PHY1_LED0: R85.1 U3.15(LED0/SPICSB)
USB_PHY1_LED1: R86.1 U3.17(LED1/SPISCK)
USB_PHY2_LED0: R106.1 U4.15(LED0/SPICSB)
USB_PHY2_LED1: R107.1 U4.17(LED1/SPISCK)
USB_PHY3_LED0: R127.1 U5.15(LED0/SPICSB)
USB_PHY3_LED1: R128.1 U5.17(LED1/SPISCK)
USBDN_DM1: C76.1 L2.3 U4.7(U2DM)
USBDN_DM2: C100.1 L3.3 U5.7(U2DM)
USBDN_DP1: C76.2 L2.4 U4.8(U2DP)
USBDN_DP2: C100.2 L3.4 U5.8(U2DP)
WDG_EN: R129.2 R132.1 U6.1(OE)
WDG_IN: R130.2 R133.1 U6.2(A)
WDG_OUT: CON1.189 R131.2
N16784444: L1.1 U1.31(USBDP_UP)
N16784459: C14.1 R12.2 R14.1 U1.27(VBUS_DET)
N16784504: L1.2 U1.30(USBDM_UP)
N16784588: L2.1 R15.2
N16784602: R15.1 U1.2(USBDP_DN1)
N16784625: R16.1 U1.1(USBDM_DN1)
N16784627: L2.2 R16.2
N16784669: L3.1 R18.2
N16784679: R18.1 U1.4(USBDP_DN2)
N16784696: R19.1 U1.3(USBDM_DN2)
N16784698: L3.2 R19.2
N16784839: LED1.2 R20.1
N16784841: R20.2 R21.1 U1.28(SUSP_IND/LOCAL_PWR/NON_REM0)
N16784881: R22.1 U1.22(SDA/NON_REM1)
N16784887: R25.1 U1.24(SCL/CFG_SEL0)
N16784899: R23.1 U1.25(HS_IND/CFG_SEL1)
N16784901: LED2.2 R23.2
N16784952: R27.2 U1.33(XTALIN/CLKIN)
N16784992: R26.1 Y1.1(OE)
N16785050: R27.1 Y1.3(CLKOUT)
N16785062: B1.1 C19.1 C20.1 C21.1 C22.1 U1.5(VDDA33#5) U1.10(VDDA33#10) U1.29(VDDA33#29) U1.36(VDD33#36)
N16794955: R29.1 U2.1(RSET)
N16795011: R40.2 U2.11(RXD2/INTB)
N16795095: R32.2 U2.3(MDI0+)
N16795115: R33.2 U2.4(MDI0-)
N16795152: R34.2 U2.5(MDI1+)
N16795175: R35.2 U2.6(MDI1-)
N16795204: R36.1 Y2.1(NC)
N16795230: R38.1 U2.31(CKXTAL1)
N16795248: R37.1 R39.1 Y2.3(CLKOUT)
N16795493: LED3.1 R51.1
N16795543: LED4.1 R53.1
N16807208: R131.1 U6.4(Y)
N16827733: C42.1 R58.2 R59.2
N16827739: C43.1 R60.2 R61.2
N16828181: L4.4 R54.2
N16828199: L4.2 R55.2
N16828223: L5.4 R56.2
N16828257: L5.2 R57.2
N16830222: C66.1 R79.2 R80.2
N16830226: C67.1 R81.2 R82.2
N16830861: L6.4 R75.2
N16830901: L6.2 R76.2
N16830943: L7.4 R77.2
N16831003: L7.2 R78.2
N16858720: C120.1 D1.1 D2.1 U7.8(VDD)
N16858790: C119.2 U7.1(XI) Y6.1
N16858846: U7.2(XOUT) Y6.4
N16858867: R134.1 U7.6(SCL)
N16858889: R135.1 U7.5(SDA)
N16904554: C70.1 U4.22(XTAL2) Y4.3
N16904584: C71.1 U4.21(XTAL1) Y4.1
N16904620: R87.1 U4.24(RSET)
N16904648: R90.2 U4.20(SPISDO)
N16904666: R88.2 U4.19(LANWAKEB)
N16904733: R91.2 U4.18(SPISDI)
N16904760: R89.1 U4.2(MDIP0)
N16904786: R92.1 U4.3(MDIN0)
N16904816: R93.1 U4.4(MDIP1)
N16904846: R94.1 U4.5(MDIN1)
N16904849: R95.1 U4.14(GPIO)
N16904929: C77.1 C78.1 U4.12(DVDD12_UPS)
N16906154: C46.1 U3.22(XTAL2) Y3.3
N16906184: C47.1 U3.21(XTAL1) Y3.1
N16906220: R66.1 U3.24(RSET)
N16906256: R67.2 U3.20(SPISDO)
N16906288: R68.2 U3.19(LANWAKEB)
N16906379: R69.2 U3.18(SPISDI)
N16906406: R70.1 U3.2(MDIP0)
N16906434: R71.1 U3.3(MDIN0)
N16906464: R72.1 U3.4(MDIP1)
N16906496: R73.1 U3.5(MDIN1)
N16906499: R74.1 U3.14(GPIO)
N16906579: C53.1 C54.1 U3.12(DVDD12_UPS)
N16907937: C94.1 U5.22(XTAL2) Y5.3
N16907967: C95.1 U5.21(XTAL1) Y5.1
N16908003: R108.1 U5.24(RSET)
N16908039: R110.2 U5.20(SPISDO)
N16908071: R111.2 U5.19(LANWAKEB)
N16908162: R112.2 U5.18(SPISDI)
N16908189: R109.1 U5.2(MDIP0)
N16908216: R113.1 U5.3(MDIN0)
N16908245: R114.1 U5.4(MDIP1)
N16908276: R115.1 U5.5(MDIN1)
N16908278: R116.1 U5.14(GPIO)
N16908358: C101.1 C102.1 U5.12(DVDD12_UPS)
N16909749: L12.1 U9.3(LX)
N16909751: B19.1 C136.1 C137.1 C138.2 L12.2 R157.2
N16909773: C134.1 R156.2 U9.1(EN)
N16909805: C138.1 R157.1 R158.1 U9.5(FB)
N16913314: R136.1 U8.2(A0)
N16913356: R138.1 U8.4(A2)
N16913398: R140.1 U8.6(A4)
N16914822: LED10.1 R142.1
N16914827: LED9.1 R143.1
N16914832: LED8.1 R144.1
N16914837: LED7.1 R145.1
N16914842: LED6.1 R146.1
N16914847: LED5.1 R147.1
N16919283: B4.2 C44.1 T1.P5
N16919393: B5.2 R62.1 R63.1
N16919418: R63.2 T1.P9
N16919425: R62.2 T1.P11
N16921051: B3.2 C45.1 T1.P4
N16921457: B7.2 C69.1 T2.P4
N16921471: B8.2 C68.1 T2.P5
N16921489: B9.2 R83.1 R84.1
N16921509: R83.2 T2.P11
N16921511: R84.2 T2.P9
N16926793: L8.4 R96.2
N16926845: L8.2 R97.2
N16926903: L9.4 R98.2
N16926978: L9.2 R99.2
N16927021: C90.1 R100.2 R101.2
N16927025: C91.1 R102.2 R103.2
N16927065: B11.2 C93.1 T3.P4
N16927083: B12.2 C92.1 T3.P5
N16927101: B13.2 R104.1 R105.1
N16927121: R104.2 T3.P11
N16927123: R105.2 T3.P9
N16928347: L10.4 R117.2
N16928399: L10.2 R118.2
N16928457: L11.4 R119.2
N16928532: L11.2 R120.2
N16928575: C114.1 R121.2 R122.2
N16928579: C115.1 R123.2 R124.2
N16928619: B15.2 C117.1 T4.P4
N16928637: B16.2 C116.1 T4.P5
N16928655: B17.2 R125.1 R126.1
N16928675: R125.2 T4.P11
N16928677: R126.2 T4.P9
N16932742: CON1.193 R9.1
N16941834: J1.5 R155.1
N16941843: J1.4 R154.1
N16941862: J1.6 R153.1
N16941871: J1.7 R152.1
N16953115: R160.2 U10.1(DIR)
N16953753: R137.1 U10.2(A0)
N16956296: R139.1 U10.4(A2)
N16956299: R141.1 U10.6(A4)
N16960351: J1.8 R148.1
N16960375: J1.9 R149.1

Pads without a net: CON1 3 4 5 6 7 9 10 11 12 13 14 15 16 17 18 21 22 23 24 25 26 28 32 33 34 35 36 41 42 43 44 45 46 47 48 49 50 51 52 53 54 57 59 60 62 63 64 65 66 67 68 69 70 71 72 75 76 77 78 79 81 82 83 84 85 86 88 89 90 93 94 95 96 97 98 99 100 105 107 109 115 116 117 118 119 120 121 122 123 124 125 126 127 128 130 133 134 135 136 137 138 139 140 141 142 143 144 145 146 147 148 151 154 155 156 157 158 161 162 163 164 166 171 173 175 176 177 178 179 180 181 182 183 185 187 194; T1 P7; T2 P7; T3 P7; T4 P7; U1 6 7 8 9 12 16 18 19 20 21 32; U2 13 18 19 27; U3 11; U4 11; U5 11; U7 3 7; U8 3 5 7 8 9; U10 11 12 13 15 17

## Via types
v1: diameter 0.5, hole 0.25, TOP to BOTTOM, 888 vias

## Routing (per net, layer and track width the routed paths; a pad name or vN(x,y) marks a point on that pad's centre or on a via; arc(x,y) is an arc through that point)
GND: length 586.4
  TOP w0.254: 49.43,36.32 C53.2 ; C53.2 50.04,35.71 ; C53.2 50.04,36.93 ; C54.2 50.04,38.2 ; C54.2 50.04,36.98 ; C54.2 49.43,37.59 ; 61.85,46.33 61.85,45.72 61.24,45.72 ; C22.2 62.61,31.47 ; C22.2 62,30.86 ; C22.2 62.61,30.25 ; 49.43,38.86 C50.2 50.04,38.25 ; C139.2 20.83,81.51 ; C139.2 21.44,80.9 ; C139.2 20.22,80.9 ; 77.98,15.77 C7.2 ; C7.2 77.98,16.99 ; C7.2 78.59,16.38 ; U10.8 12.32,71.33 ; U10.8 11.39,71.02 ; U10.8 13.11,71.02 v1(13.46,71.37) 13.17,71.67 U10.7 ; U10.8 12.32,70.71 ; 68.45,47.22 R108.2 68.45,46 ; 21.46,15.65 C13.2 21.46,16.87 ; C104.2 72.62,44.45 ; C104.2 72.01,45.06 ; C104.2 71.4,44.45 ; 71.33,13.51 CON1.114 ; CON1.114 71.88,14.89 ; CON1.114 72.43,13.51 ; 41.05,44.45 C48.2 ; C48.2 42.27,44.45 ; C48.2 41.66,45.06 ; C19.2 71.25,22.33 ; C19.2 71.25,21.11 ; C19.2 70.64,21.72 ; 46.51,36.83 C60.2 47.73,36.83 ; C121.2 20.95,74.65 ; C121.2 20.35,74.04 ; C121.2 21.56,74.04 ; 71.48,67.18 C111.1 70.26,67.18 ; C4.2 79.5,4.93 ; C4.2 80.11,4.32 ; C4.2 78.89,4.32 ; C91.2 63.98,67.44 ; C91.2 63.37,66.83 ; C91.2 62.76,67.44 ; CON1.91 22.9,55.33 ; CON1.91 22.35,56.7 ; CON1.91 21.8,55.33 ; 57.26,50.64 Y4.2 57.26,48.89 ; C93.2 62.2,81.66 ; C93.2 61.59,81.05 ; C93.2 60.99,81.66 ; 22.29,18.62 C9.2 ; C9.2 21.35,20.07 ; C9.2 23.23,20.07 ; CON1.149 49.57,9.61 ; CON1.149 48.47,9.61 ; CON1.149 49.02,10.98 ; 19.2,2.54 C3.2 ; C3.2 19.81,1.93 ; C3.2 19.81,3.15 ; 18.92,76.26 U8.11 ; U8.11 18.92,76.89 ; U8.11 19.85,76.58 ; U8.11 v1(17.66,76.58) ; Y6.2 5.06,29.79 ; Y6.2 4.23,28.67 ; Y6.2 3.41,29.79 ; 53.34,44.73 C81.2 53.34,45.95 ; U10.10 12.32,70.03 ; U10.10 12.32,69.41 ; U10.10 11.39,69.72 ; U10.10 13.08,69.72 v1(13.46,70.1) 13.2,70.37 U10.9 ; 71.27,27.08 C24.2 70.66,26.47 ; C5.2 78.59,4.32 ; C5.2 77.37,4.32 ; C5.2 77.98,4.93 ; 89.66,81.17 R159.1 ; R159.1 91.11,82.11 ; R159.1 88.21,82.11 ; 56.09,59.23 CON1.38 ; CON1.38 57.19,59.23 ; CON1.38 56.64,57.85 ; 16.72,9.61 CON1.199 17.27,10.98 ; 50.06,67.44 C90.2 ; C90.2 50.67,66.83 ; C90.2 51.28,67.44 ; 2.36,19.68 K1.1 3.54,20.46 ; 17.91,39.65 C30.2 ; C30.2 18.52,40.26 ; C30.2 17.3,40.26 ; 35.43,41.81 C27.2 ; C27.2 35.43,43.03 ; C27.2 34.82,42.42 ; 33.23,55.33 CON1.73 ; CON1.73 34.33,55.33 ; CON1.73 33.78,56.7 ; 17.99,77.88 U8.13 ; U8.13 18.92,77.56 ; U8.13 20.04,77.88 v1(20.32,77.6) 19.95,77.23 U8.12 ; C28.2 18.53,49.4 ; C28.2 17.59,50.85 ; C28.2 16.65,49.4 ; U8.17 v1(17.57,80.48) ; 77.47,33.68 C106.2 ; C106.2 77.47,34.9 ; C106.2 76.86,34.29 ; 30.84,66.83 C43.2 ; C43.2 31.45,67.44 ; C43.2 30.24,67.44 ; C2.2 18.41,3.15 ; C2.2 19.02,2.54 ; C2.2 18.41,1.93 ; 84.73,21.72 LED1.1 ; LED1.1 85.34,22.33 ; LED1.1 85.95,21.72 ; LED1.1 85.34,21.11 ; 76.86,36.83 C108.2 78.08,36.83 ; 45.72,66.83 C67.2 ; C67.2 46.33,67.44 ; C67.2 45.11,67.44 ; U4.6 57.12,39.77 v1(56.87,39.52) ; 34.82,39.88 R46.1 35.43,40.49 ; 45.85,80.92 C68.2 ; C68.2 45.24,81.53 ; C68.2 46.46,81.53 ; C1.2 73.15,4.93 ; C1.2 72.54,4.32 ; C1.2 73.76,4.32 ; CON1.184 27.43,14.89 ; CON1.184 27.98,13.51 ; CON1.184 26.88,13.51 ; CON1.167 38.14,9.61 ; CON1.167 37.59,10.98 ; CON1.167 37.04,9.61 ; 49.02,12.13 CON1.150 ; CON1.150 48.47,13.51 ; CON1.150 49.57,13.51 ; 7.11,45.36 C135.2 7.11,46.58 ; 33.02,66.83 C66.2 ; C66.2 32.41,67.44 ; C66.2 33.63,67.44 ; 71.25,19.84 R21.2 ; R21.2 70.64,20.45 ; R21.2 71.25,21.06 ; C133.2 12.75,44.7 ; C133.2 11.13,44.7 ; C133.2 11.94,45.64 ; 74.57,67.18 C110.1 75.79,67.18 ; C123.2 5.08,77.83 ; C123.2 5.08,76.61 ; C123.2 5.69,77.22 ; 68.58,18.14 C14.2 67.97,17.53 ; C18.2 64.26,18.14 ; C18.2 64.87,17.53 ; C18.2 63.65,17.53 ; 38.1,47.22 R66.2 38.1,46 ; 18.81,67.18 C38.1 20.02,67.18 ; 68.07,57.85 CON1.20 ; CON1.20 68.62,59.23 ; CON1.20 67.52,59.23 ; 25.87,67.18 C40.1 24.65,67.18 ; 46,45.72 C47.2 46.61,46.33 ; 43.71,35.31 C55.2 44.32,35.92 ; C119.1 12.19,31.72 ; C119.1 12.19,30.51 ; C119.1 12.8,31.11 ; 68.45,45.95 C105.2 68.45,44.73 ; 72.65,27.54 Y1.2 ; Y1.2 73.53,26.76 ; Y1.2 74.41,27.54 ; 61.86,46.39 Y4.4 ; Y4.4 61.86,48.14 ; Y4.4 62.94,47.26 ; 84.73,20.19 LED2.1 ; LED2.1 85.95,20.19 ; LED2.1 85.34,20.8 ; LED2.1 85.34,19.58 ; 74.07,35.31 C99.2 74.68,35.92 ; 79.5,57.85 CON1.2 ; CON1.2 78.95,59.23 ; CON1.2 80.05,59.23 ; 64.92,17.53 R25.2 65.53,18.14 ; C124.2 4.95,79.86 ; C124.2 5.56,79.25 ; C124.2 4.34,79.25 ; 77.37,17.65 C6.2 ; C6.2 77.98,17.04 ; C6.2 78.59,17.65 ; CON1.55 45.21,56.7 ; CON1.55 44.66,55.33 ; CON1.55 45.76,55.33 ; 5.69,75.95 C125.2 5.08,76.56 ; C16.2 79.65,25.55 ; C16.2 79.04,24.94 ; C16.2 79.65,24.33 ; 7.11,49.12 C131.2 7.11,47.9 ; 55.65,67.18 C86.1 56.87,67.18 ; 35.28,20.7 C118.2 34.67,20.09 ; 40.06,22.44 U6.3 40.7,22.11 ; 11.39,82.43 U8.1 ; U8.1 12.32,82.74 ; U8.1 v1(13.59,82.43) ; 72.38,48.89 Y5.2 73.45,49.76 ; 71.12,18.44 C15.2 71.12,19.66 ; 59.9,13.51 CON1.132 ; CON1.132 60.45,14.89 ; CON1.132 61,13.51 ; 62.64,81.66 C92.2 ; C92.2 63.86,81.66 ; C92.2 63.25,81.05 ; 5.08,81.76 C122.2 4.47,81.15 ; 7.93,58.65 TVS5.2 6.6,59.59 ; CON1.113 71.88,10.98 ; CON1.113 71.33,9.61 ; CON1.113 72.43,9.61 ; 29.36,81.66 C44.2 ; C44.2 29.97,82.27 ; C44.2 30.58,81.66 ; 16.72,13.51 CON1.200 17.27,14.89 ; 20.17,41.66 R49.1 19.56,41.05 ; C128.2 3.05,49.25 ; C128.2 2.44,48.64 ; C128.2 3.05,48.03 ; 11.94,45.92 C132.2 ; C132.2 12.75,46.86 ; C132.2 11.94,47.8 ; C132.2 11.13,46.86 ; 81.69,81.53 C116.2 ; C116.2 82.3,80.92 ; C116.2 82.91,81.53 ; 31.88,47.65 C34.2 ; C34.2 32.49,48.26 ; C34.2 31.27,48.26 ; CON1.104 78.23,14.89 ; CON1.104 78.78,13.51 ; CON1.104 77.68,13.51 ; 33.15,47.65 R29.2 ; R29.2 33.76,48.26 ; R29.2 32.54,48.26 ; 57.96,32.89 C23.2 57.15,32.21 ; U8.10 13.46,76.58 v1(13.46,76.58) ; CON1.190 24.17,13.51 ; CON1.190 23.62,12.13 ; CON1.190 23.62,14.89 ; CON1.190 23.07,13.51 ; 80.39,36.93 C102.2 80.39,35.71 ; 24.34,67.18 C39.1 23.12,67.18 ; CON1.1 80.05,55.33 ; CON1.1 78.95,55.33 ; CON1.1 79.5,56.7 ; 25.61,13.51 CON1.186 ; CON1.186 26.16,14.89 ; CON1.186 26.71,13.51 ; 18.8,32.03 18.8,32.64 ; 18.8,32.64 18.19,32.64 ; 18.8,32.64 18.8,33.25 ; C20.2 71.27,29.62 ; C20.2 70.66,29.01 ; C20.2 71.27,28.4 ; 47.12,34.95 C58.2 ; C58.2 46.51,35.56 ; C58.2 47.73,35.56 ; 62.71,67.18 C89.1 61.49,67.18 ; 33.68,67.18 C63.1 34.9,67.18 ; 59.9,9.61 CON1.131 ; CON1.131 61,9.61 ; CON1.131 60.45,10.98 ; 39.22,67.18 C62.1 38,67.18 ; 49.43,41.4 C56.2 50.04,42.01 ; 93.47,78.75 CY1.1 ; CY1.1 92.21,80.01 ; CY1.1 93.47,81.27 ; CY1.1 94.73,80.01 ; 42.02,48.89 Y3.2 42.02,50.64 ; C78.2 65.28,36.93 ; C78.2 65.89,36.32 ; C78.2 65.28,35.71 ; 77.32,67.18 C112.1 76.1,67.18 ; 43.84,67.18 C65.1 45.06,67.18 ; CON1.168 38.14,13.51 ; CON1.168 37.59,14.89 ; CON1.168 37.04,13.51 ; 80.04,81.53 C117.2 ; C117.2 80.64,80.92 ; C117.2 81.25,81.53 ; C42.2 19.41,63.6 ; C42.2 18.81,62.99 ; C42.2 19.41,62.38 ; C72.2 57.51,44.45 ; C72.2 56.29,44.45 ; C72.2 56.9,45.06 ; C35.2 35.43,41.76 ; C35.2 35.43,40.54 ; C35.2 34.82,41.15 ; 43.59,81.53 C69.2 ; C69.2 44.81,81.53 ; C69.2 44.2,80.92 ; 19.81,4.98 C11.2 20.42,5.59 ; v1(13.46,74.3) 13.44,74.27 U10.3 ; 49.43,42.67 C51.2 50.04,42.06 ; C45.2 28.93,81.66 ; C45.2 27.71,81.66 ; C45.2 28.32,82.27 ; C45.2 28.32,81.05 ; 61.75,35.56 C84.2 ; C84.2 62.97,35.56 ; C84.2 62.36,34.95 ; 19.33,35.36 Y2.2 ; Y2.2 20.21,36.14 ; Y2.2 18.46,36.14 ; CON1.188 24.89,14.89 ; CON1.188 24.34,13.51 ; CON1.188 25.44,13.51 ; 12.32,71.36 U10.7 ; U10.7 11.39,71.67 ; v1(71.98,39.52) 72.23,39.77 U5.6 ; 65.28,36.98 C77.2 65.28,38.2 ; 20.17,40.01 C37.2 18.95,40.01 ; 21.8,59.23 CON1.92 22.9,59.23 ; 76.86,35.56 C97.2 ; C97.2 78.08,35.56 ; C97.2 77.47,34.95 ; 62.97,36.83 C82.2 61.75,36.83 ; U8.12 18.92,77.54 ; U8.12 18.92,76.91 ; U8.12 17.99,77.23 ; 14.22,24.66 U7.4 ; U7.4 14.22,25.63 ; U7.4 15.42,25.15 ; U10.19 v1(17.66,74.92) ; 38.1,45.95 C59.2 38.1,44.73 ; CON1.19 68.62,55.33 ; CON1.19 68.07,56.7 ; CON1.19 67.52,55.33 ; J1.3 3,58.86 ; J1.3 3.78,58.08 ; J1.3 2.22,58.08 ; J1.3 3,57.3 ; CON1.74 33.78,60.61 ; CON1.74 34.33,59.23 ; CON1.74 33.23,59.23 ; 58.39,67.18 C88.1 57.18,67.18 ; 43.66,19.3 R132.2 42.44,19.3 ; 81.69,67.44 C115.2 ; C115.2 82.3,66.83 ; C115.2 82.91,67.44 ; Y3.4 46.62,48.14 ; Y3.4 47.7,47.26 ; Y3.4 46.62,46.39 ; Y6.3 5.06,26.59 ; Y6.3 3.41,26.59 ; Y6.3 4.23,27.72 ; 44.66,59.23 CON1.56 ; CON1.56 45.21,60.61 ; CON1.56 45.76,59.23 ; 58.95,35.31 C79.2 59.56,35.92 ; 53.34,46 R87.2 53.34,47.22 ; 76.35,45.72 C95.2 76.96,46.33 ; Y5.4 76.98,48.14 ; Y5.4 76.98,46.39 ; Y5.4 78.05,47.26 ; 56.09,55.33 CON1.37 ; CON1.37 57.19,55.33 ; CON1.37 56.64,56.7 ; R24.2 71.27,28.35 ; R24.2 71.27,27.13 ; R24.2 70.66,27.74 ; 51.33,67.18 C87.1 52.55,67.18 ; 21.46,18.26 C12.2 21.46,17.04 ; 39.52,67.18 C64.1 40.74,67.18 ; 30.18,67.18 C41.1 28.97,67.18 ; 69.6,66.83 C114.2 ; C114.2 68.99,67.44 ; C114.2 70.21,67.44 ; 4.04,45.09 R158.2 2.82,45.09 ; U8.19 v1(17.54,81.78) ; U3.6 41.88,39.77 v1(41.63,39.52) ; U10.5 13.41,72.97 v1(13.46,73.03) ; 47.12,33.68 C57.2 ; C57.2 47.12,34.9 ; C57.2 46.51,34.29 ; 67.31,18.14 R14.2 67.92,17.53 ; 12.32,70.06 U10.9 ; U10.9 11.39,70.37 ; U10.9 12.32,70.68 ; 77.68,9.61 CON1.103 ; CON1.103 78.23,10.98 ; CON1.103 78.78,9.61 ; 81.64,67.18 C113.1 80.42,67.18 ; 80.39,38.2 C101.2 80.39,36.98 ; 24.03,5.71 C8.2 25.25,5.71 ; U8.15 20.26,79.18 v1(20.32,79.12) ; 35.43,43.08 R38.2 34.82,43.69 ; 61.75,34.29 C83.2 ; C83.2 62.36,33.68 ; C83.2 62.36,34.9
  TOP w0.305: U1.11 61.19,25.63 60.96,25.4 v1(60.83,25.4) 60.83,25.27 ; U6.3 v1(39.26,22.11) ; R132.2 v1(43.05,18.41) ; C139.2 v1(20.83,80.01) ; R133.2 v1(43.94,23.11)
  TOP w0.381: C68.2 v1(45.85,82.42) ; C49.2 v1(37.19,44.07) ; v1(57.15,33.78) C23.2 v1(56.26,32.89) ; v1(45.59,29.97) C61.2 v1(46.61,30.86) ; v1(78.33,47.65) 77.36,47.65 Y5.4 ; C134.2 v1(5.21,37.47) ; Y1.2 v1(73.53,28.43) ; v1(63.22,47.65) 62.25,47.65 Y4.4 ; C118.2 v1(33.78,20.7) ; 22.29,20.26 C9.2 22.8,19.56 v1(23.5,19.56) ; 22.29,20.26 v1(22.29,21.91) ; 22.29,20.26 22.86,20.83 v1(23.5,20.83) ; v1(13.08,45.21) 12.45,45.21 C133.2 12.45,44.2 v1(13.08,44.2) ; C5.2 v1(77.98,3.43) ; C99.2 v1(74.68,34.39) ; C101.2 v1(81.31,37.59) ; C106.2 v1(78.38,34.29) ; C70.2 56.92,45.72 v1(56.52,45.31) 56.52,44.83 C72.2 ; R21.2 v1(72.14,20.45) ; v1(43.3,49.78) 43.18,49.78 43.16,49.76 Y3.2 v1(40.54,49.76) ; v1(7.37,40.54) U9.2 v1(7.37,42.32) ; C54.2 v1(50.95,37.59) ; R14.2 v1(67.31,16.64) ; v1(9.78,57.28) 9.78,56.64 10.48,55.94 ; C119.1 v1(11.3,31.11) ; R44.1 v1(22.1,45.47) ; R46.1 v1(36.24,39.88) ; v1(5.33,19.68) K1.1 v1(3.54,18.43) ; v1(62.36,37.64) C82.2 C84.2 ; TVS5.2 v1(5.1,58.65) ; TVS5.2 7.21,58.04 v1(8.26,58.04) ; TVS5.2 v1(6.6,57.53) ; C77.2 v1(66.19,37.59) ; v1(11.05,57.15) C130.2 10.48,55.94 ; C15.2 v1(72.01,19.05) ; C31.2 v1(21.08,44.32) ; C78.2 65.79,35.81 v1(65.79,35.31) ; C36.2 v1(21.08,45.59) ; v1(70.9,49.76) Y5.2 v1(72.38,50.97) ; v1(6.99,50.29) C129.2 v1(4.83,50.29) ; C32.2 24.13,48.9 v1(23.75,49.28) ; C32.2 C33.2 v1(22.86,49.28) ; C32.2 C26.2 ; C74.2 v1(66.19,38.86) ; C6.2 v1(77.98,18.54) ; C21.2 v1(56.64,26.67) ; v1(89.03,80.77) 89.03,81.47 R159.1 90.42,81.34 v1(90.42,80.77) ; C37.2 v1(19.56,40.77) ; 10.48,55.94 v1(9.33,55.94) ; C117.2 v1(80.64,82.42) ; C105.2 v1(67.54,45.34) ; C30.2 v1(17.91,41.27) ; C59.2 v1(37.19,45.34) ; C79.2 v1(59.56,34.5) ; R25.2 v1(65.53,16.64) ; C97.2 C108.2 v1(77.47,37.64) ; C53.2 v1(50.95,36.32) ; R66.2 v1(37.19,46.61) ; C103.2 v1(81.31,41.4) ; C55.2 v1(44.32,34.39) ; R49.1 v1(18.8,41.66) ; 18.8,32.64 v1(19.68,32.64) ; C95.2 v1(76.96,44.96) ; v1(51.44,41.66) 51.18,41.4 C56.2 ; v1(19.3,37.11) 19.3,37.08 19.33,37.05 Y2.2 ; C135.2 v1(6.22,45.97) ; C116.2 v1(82.3,82.42) ; v1(13.01,46.48) 12.32,46.48 C132.2 12.45,47.37 v1(13.01,47.37) ; C8.2 v1(24.64,6.6) ; R29.2 v1(33.15,49.15) ; v1(75.95,29.97) C109.2 v1(76.83,30.86) ; C46.2 41.68,45.72 v1(41.27,45.31) 41.27,44.83 C48.2 ; C57.2 v1(48.03,34.29) ; C98.2 v1(81.31,38.86) ; C16.2 v1(80.54,24.94) ; R158.2 v1(3.43,45.97) ; C80.2 v1(66.19,41.4) ; C75.2 v1(66.19,42.67) ; C35.2 v1(36.24,41.15) ; v1(63.27,34.92) 62.64,34.29 C83.2 ; v1(61.72,30.86) C85.2 v1(60.83,29.97) ; C17.2 v1(56.64,22.86) ; v1(47.98,47.65) 47.01,47.65 Y3.4 ; C13.2 v1(22.48,16.26) ; C69.2 v1(44.2,82.42) ; C58.2 C60.2 v1(47.12,37.64) ; C24.2 v1(72.16,26.47) ; C102.2 v1(81.31,36.32) ; C7.2 v1(77.09,16.38) ; C137.2 9.65,43.18 ; C20.2 v1(72.16,29.01) ; R87.2 v1(52.43,46.61) ; C2.2 v1(17.53,2.54) ; R43.2 v1(31.37,33.48) ; C12.2 v1(22.48,17.65) ; C107.2 v1(67.54,44.07) ; v1(58.54,49.78) 58.42,49.78 58.4,49.76 Y4.2 v1(55.78,49.76) ; C29.2 v1(22.1,41.27) ; C96.2 v1(81.31,42.67) ; v1(17.53,5.59) C10.2 C11.2 ; C1.2 v1(73.15,3.43) ; U7.4 v1(12.57,25.15) ; C73.2 v1(52.43,44.07) ; C27.2 v1(36.24,42.42) ; C47.2 v1(46.61,44.96) ; C94.2 72.03,45.72 v1(71.63,45.31) 71.63,44.83 C104.2 ; C19.2 v1(72.14,21.72) ; C93.2 v1(61.59,82.55) ; C50.2 v1(50.95,38.86) ; C18.2 v1(64.26,16.64) ; C131.2 v1(6.22,48.51) ; C51.2 v1(51.44,42.67) ; R38.2 v1(36.24,43.69) ; C3.2 v1(20.7,2.54) ; C81.2 v1(52.43,45.34) ; R108.2 v1(67.54,46.61) ; v1(16.45,48.82) 17,48.82 C28.2 16.95,50.04 v1(16.38,50.04) ; C4.2 v1(79.5,3.43) ; C92.2 v1(63.25,82.55) ; 61.85,45.72 v1(61.85,44.96) ; R24.2 v1(72.16,27.74) ; C34.2 v1(31.88,49.15) ; C14.2 v1(68.58,16.64) ; C25.2 v1(56.64,24.13)
  TOP w0.508: C136.2 C137.2 v1(8.76,42.55) ; C113.1 v1(81.03,67.94) ; C128.2 v1(4.06,48.64) ; CON1.20 v1(68.07,60.83) ; v1(20.19,62.99) C42.2 ; C115.2 v1(82.3,68.2) ; CON1.104 v1(78.23,11.9) ; C91.2 v1(63.37,68.2) ; CON1.132 v1(60.45,11.9) ; CON1.1 v1(79.5,53.72) ; CON1.186 v1(26.16,11.9) ; CON1.168 v1(37.59,11.9) ; CON1.200 v1(17.27,11.9) ; v1(4.19,75.95) C125.2 ; Y6.3 v1(4.23,25.19) ; CON1.167 v1(37.59,8) ; C121.2 v1(20.95,73.03) ; CON1.150 v1(49.02,15.11) ; C40.1 v1(25.26,67.94) ; C122.2 5.08,80.39 v1(4.95,80.26) ; C124.2 v1(4.95,78.36) ; C86.1 v1(56.26,67.94) ; CON1.56 v1(45.21,57.62) ; C87.1 v1(51.94,67.94) ; C110.1 v1(75.18,67.94) ; C114.2 v1(69.6,68.2) ; CON1.103 v1(78.23,8) ; CON1.19 v1(68.07,53.72) ; C39.1 v1(23.73,67.94) ; C90.2 v1(50.67,68.2) ; C43.2 v1(30.84,68.2) ; CON1.92 v1(22.35,57.62) ; C66.2 v1(33.02,68.2) ; CON1.38 v1(56.64,60.83) ; CON1.91 v1(22.35,53.85) ; C88.1 v1(57.78,67.94) ; CON1.74 v1(33.78,57.62) ; CON1.37 v1(56.64,53.72) ; C111.1 v1(70.87,67.94) ; CON1.184 v1(27.43,11.9) ; C65.1 v1(44.45,67.94) ; v1(4.19,77.22) C123.2 ; C62.1 v1(38.61,67.94) ; CON1.113 v1(71.88,8) ; C64.1 v1(40.13,67.94) ; C89.1 v1(62.1,67.94) ; CON1.131 v1(60.45,8) ; CON1.149 v1(49.02,8) ; Y6.2 v1(4.23,31.33) ; CON1.2 v1(79.5,60.83) ; CON1.114 v1(71.88,11.9) ; CON1.55 v1(45.21,53.72) ; CON1.188 v1(24.89,11.9) ; CON1.199 v1(17.27,8) ; C112.1 v1(76.71,67.94) ; C38.1 v1(19.41,67.94) ; C41.1 v1(29.57,67.94) ; C67.2 v1(45.72,68.2) ; C63.1 v1(34.29,67.94) ; CON1.73 v1(33.78,53.72)
  GND2 w0.254: 3,57.3 J1.3 ; J1.3 3.78,58.08 ; J1.3 3,58.86 ; J1.3 2.22,58.08 ; 92.21,80.01 CY1.1 ; CY1.1 93.47,81.27 ; CY1.1 94.73,80.01 ; CY1.1 93.47,78.75
  POWER3 w0.254: J1.3 3.78,58.08 ; J1.3 3,57.3 ; J1.3 2.22,58.08 ; J1.3 3,58.86 ; 93.47,78.75 CY1.1 ; CY1.1 92.21,80.01 ; CY1.1 94.73,80.01 ; CY1.1 93.47,81.27
  BOTTOM w0.254: CY1.1 94.73,80.01 ; CY1.1 93.47,81.27 ; CY1.1 92.21,80.01 ; CY1.1 93.47,78.75 ; J1.3 3,58.86 ; J1.3 3.78,58.08 ; J1.3 3,57.3 ; J1.3 2.22,58.08
  vias: v1(1.14,83.44) v1(1.14,81.53) v1(1.14,79.25) v1(1.14,76.96) v1(1.14,74.68) v1(1.14,72.26) v1(1.14,69.98) v1(1.14,67.69) v1(1.14,65.41) v1(1.14,63.12) v1(1.14,60.83) v1(1.14,58.55) v1(1.14,56.26) v1(1.14,53.85) v1(1.14,51.56) v1(1.14,49.28) v1(1.14,46.99) v1(1.14,44.7) v1(1.14,42.42) v1(1.14,40.13) v1(1.14,37.85) v1(1.14,35.43) v1(1.14,33.15) v1(1.14,30.86) v1(1.14,28.57) v1(1.14,26.29) v1(1.14,24) v1(1.14,21.72) v1(1.14,19.43) v1(1.14,17.02) v1(1.14,14.73) v1(1.14,12.45) v1(3.43,13.59) v1(4.45,59.05) v1(4.45,57.66) v1(5.71,64.39) v1(5.71,13.59) v1(5.84,61.98) v1(5.84,22.99) v1(7.75,21.08) v1(8,13.59) v1(8.76,57.28) v1(8.89,54.74) v1(10.29,12.45) v1(11.43,66.93) v1(11.43,64.39) v1(11.43,16.51) v1(11.81,1.14) v1(12.57,10.16) v1(12.95,36.07) v1(12.95,34.16) v1(12.95,32.13) v1(13.34,8) v1(13.46,5.46) v1(14.1,1.14) v1(14.61,40.77) v1(14.99,51.44) v1(15.24,64.01) v1(15.49,55.5) v1(15.62,74.55) v1(15.88,82.42) v1(15.88,15.75) v1(16.38,1.14) v1(16.51,69.72) v1(16.51,67.06) v1(16.51,63.12) v1(16.64,71.88) v1(18.03,28.32) v1(18.16,66.93) v1(18.67,1.14) v1(20.57,70.1) v1(20.56,63.75) v1(20.95,1.14) v1(21.46,23.88) v1(22.35,80.01) v1(22.61,63.75) v1(22.61,35.05) v1(22.61,27.81) v1(23.37,36.58) v1(23.37,1.14) v1(23.88,63.12) v1(24,37.72) v1(24.49,81.92) v1(24.49,79.63) v1(24.49,76.45) v1(24.49,72.9) v1(25.02,23.88) v1(25.65,64.26) v1(25.65,1.14) v1(25.78,53.47) v1(26.04,49.53) v1(26.04,32.26) v1(26.04,15.49) v1(26.29,19.3) v1(26.4,62.99) v1(26.78,81.79) v1(26.78,79.88) v1(27.16,75.82) v1(27.16,73.53) v1(27.56,42.16) v1(27.56,41.15) v1(27.94,15.62) v1(27.94,1.14) v1(28.07,25.53) v1(28.07,23.5) v1(28.3,70.61) v1(28.3,68.45) v1(28.32,40.51) v1(28.43,64.77) v1(28.45,41.4) v1(28.57,49.53) v1(28.7,61.59) v1(28.96,42.8) v1(29.21,74.3) v1(29.21,40.51) v1(29.34,26.04) v1(29.59,23.5) v1(29.72,70.61) v1(29.84,42.8) v1(29.84,41.91) v1(29.97,82.55) v1(30.23,1.14) v1(31.11,49.66) v1(31.5,38.61) v1(32.51,44.96) v1(32.51,1.14) v1(33.4,69.47) v1(34.04,31.24) v1(34.54,49.02) v1(34.8,1.14) v1(35.05,61.59) v1(35.18,64.26) v1(35.56,68.96) v1(36.2,78.36) v1(36.2,76.07) v1(36.2,73.79) v1(36.32,29.08) v1(36.96,49.02) v1(36.96,38.35) v1(37.08,53.47) v1(37.08,1.14) v1(37.21,81.79) v1(37.21,79.88) v1(37.34,61.59) v1(37.72,64.26) v1(38.86,17.91) v1(39.37,82.04) v1(39.37,79.63) v1(39.37,76.2) v1(39.37,72.9) v1(39.37,64.01) v1(39.37,28.45) v1(39.37,25.4) v1(39.37,1.14) v1(39.5,19.43) v1(39.62,61.59) v1(40.13,36.96) v1(40.89,52.83) v1(41.15,64.26) v1(41.15,34.67) v1(41.15,32.38) v1(41.15,30.1) v1(41.15,15.37) v1(41.53,80.52) v1(41.78,1.14) v1(42.29,78.36) v1(42.29,76.07) v1(42.29,73.79) v1(42.55,25.4) v1(42.93,34.29) v1(43.05,61.59) v1(43.18,70.48) v1(43.43,64.64) v1(43.56,28.96) v1(43.69,41.66) v1(43.69,40.39) v1(43.81,16.13) v1(44.07,1.14) v1(44.32,41.02) v1(44.96,70.23) v1(44.96,41.66) v1(44.96,40.39) v1(45.85,26.67) v1(46.1,23.75) v1(46.35,1.14) v1(46.48,19.56) v1(46.61,61.59) v1(46.61,15.88) v1(47.24,82.55) v1(48.13,24.26) v1(48.39,21.46) v1(48.51,18.92) v1(48.64,67.18) v1(48.64,1.14) v1(48.77,69.98) v1(48.9,64.64) v1(49.02,61.09) v1(49.78,48.26) v1(49.91,50.55) v1(50.42,21.97) v1(50.67,64.01) v1(50.93,1.14) v1(51.05,53.21) v1(51.44,33.4) v1(51.44,28.7) v1(51.44,24.13) v1(51.56,18.16) v1(51.82,40.77) v1(52.32,48.13) v1(52.32,38.35) v1(52.45,61.09) v1(52.58,19.94) v1(52.96,64.26) v1(53.21,1.14) v1(53.85,37.21) v1(53.98,78.23) v1(53.98,75.95) v1(53.98,73.66) v1(54.23,18.54) v1(54.74,81.66) v1(54.74,80.01) v1(54.74,16.64) v1(54.99,34.92) v1(55.24,64.26) v1(55.5,1.14) v1(56.26,37.85) v1(56.39,35.05) v1(56.64,18.54) v1(56.64,16.51) v1(57.02,81.92) v1(57.02,79.5) v1(57.02,76.33) v1(57.02,72.9) v1(57.78,1.14) v1(57.91,61.98) v1(58.29,34.92) v1(58.67,64.26) v1(58.93,41.66) v1(58.93,40.39) v1(59.18,80.14) v1(59.31,18.29) v1(59.56,41.02) v1(60.07,78.23) v1(60.07,75.95) v1(60.07,73.66) v1(60.2,41.66) v1(60.2,40.39) v1(60.2,1.14) v1(60.96,61.85) v1(61.09,70.36) v1(61.09,27.81) v1(61.21,64.26) v1(61.85,16.89) v1(62.48,1.14) v1(62.99,25.65) v1(62.99,24.13) v1(62.99,22.61) v1(64.52,25.65) v1(64.52,24.13) v1(64.52,22.61) v1(64.77,1.14) v1(65.15,72.9) v1(65.91,82.55) v1(66.04,25.65) v1(66.04,24.13) v1(66.04,22.61) v1(67.06,1.14) v1(67.31,68.33) v1(67.31,63.63) v1(67.31,27.69) v1(67.56,52.07) v1(68.33,35.18) v1(69.09,70.36) v1(69.09,37.59) v1(69.34,33.78) v1(69.34,1.14) v1(71.25,35.56) v1(71.63,1.14) v1(71.88,15.49) v1(72.01,34.67) v1(72.14,70.48) v1(72.14,63.63) v1(72.77,78.11) v1(72.77,75.82) v1(72.77,73.53) v1(73.03,34.54) v1(73.66,52.2) v1(73.79,81.66) v1(73.79,80.01) v1(73.91,63.63) v1(73.91,1.14) v1(74.04,41.66) v1(74.04,40.39) v1(74.68,41.02) v1(74.68,19.18) v1(74.93,15.75) v1(75.18,11.56) v1(75.31,41.66) v1(75.31,40.39) v1(75.95,81.79) v1(75.95,79.76) v1(75.95,76.33) v1(75.95,72.77) v1(75.95,21.84) v1(76.2,1.14) v1(77.22,52.2) v1(77.47,11.56) v1(77.72,63.88) v1(78.11,80.01) v1(78.49,1.14) v1(79.12,77.85) v1(79.12,75.56) v1(79.12,73.28) v1(79.88,69.98) v1(80.01,63.88) v1(80.14,19.18) v1(80.9,1.14) v1(81.92,53.72) v1(81.92,50.29) v1(82.04,62.61) v1(82.93,24.26) v1(83.19,1.14) v1(83.31,69.72) v1(83.31,46.61) v1(83.31,42.04) v1(83.31,37.47) v1(83.31,32.89) v1(83.31,28.32) v1(83.69,82.55) v1(84.58,78.87) v1(85.34,22.61) v1(85.34,19.18) v1(85.34,16.89) v1(85.47,1.14) v1(85.6,5.21) v1(85.72,69.85) v1(85.72,67.56) v1(85.72,65.28) v1(85.72,62.99) v1(85.72,60.71) v1(85.72,58.29) v1(85.72,56.01) v1(85.72,53.72) v1(85.72,51.44) v1(85.72,49.15) v1(85.72,46.86) v1(85.72,44.58) v1(85.72,42.29) v1(85.72,40.01) v1(85.72,37.59) v1(85.72,35.31) v1(85.72,33.02) v1(85.72,30.73) v1(85.72,28.45) v1(85.72,26.16) v1(85.72,23.88) v1(85.98,82.55) v1(86.11,3.17) v1(87.38,1.14) v1(87.5,75.95) v1(87.63,15.88) v1(88.52,73.41) v1(88.52,71.12) v1(88.9,12.32) v1(90.81,15.88) v1(90.93,71.12) v1(91.19,13.34) v1(91.69,82.55) v1(91.82,80.01) v1(93.22,71.12) v1(93.47,78.23) v1(93.47,74.68) v1(94.11,82.55) v1(94.74,13.21) v1(95.25,80.01) v1(95.5,71.12) v1(95.5,15.88) v1(96.39,82.55) v1(97.03,12.19) v1(97.79,71.12) v1(98.55,82.55) v1(98.93,80.77) v1(98.93,78.49) v1(98.93,76.2) v1(98.93,73.91) v1(98.93,71.63) v1(98.93,15.88) v1(98.93,10.92)
